# Altium PCB PCB1.PcbDoc (part 1 of 2)
Units mm, origin at the board's own origin, x right, y up, seen from the top; angles counter-clockwise.
Board outline 54.61 x 46.35 mm, 4 copper layers (Top Layer, Layer 1, Layer 2, Bottom Layer), stack 1.587 mm thick; 183 components, 132 nets, 434 pads, 125 vias.
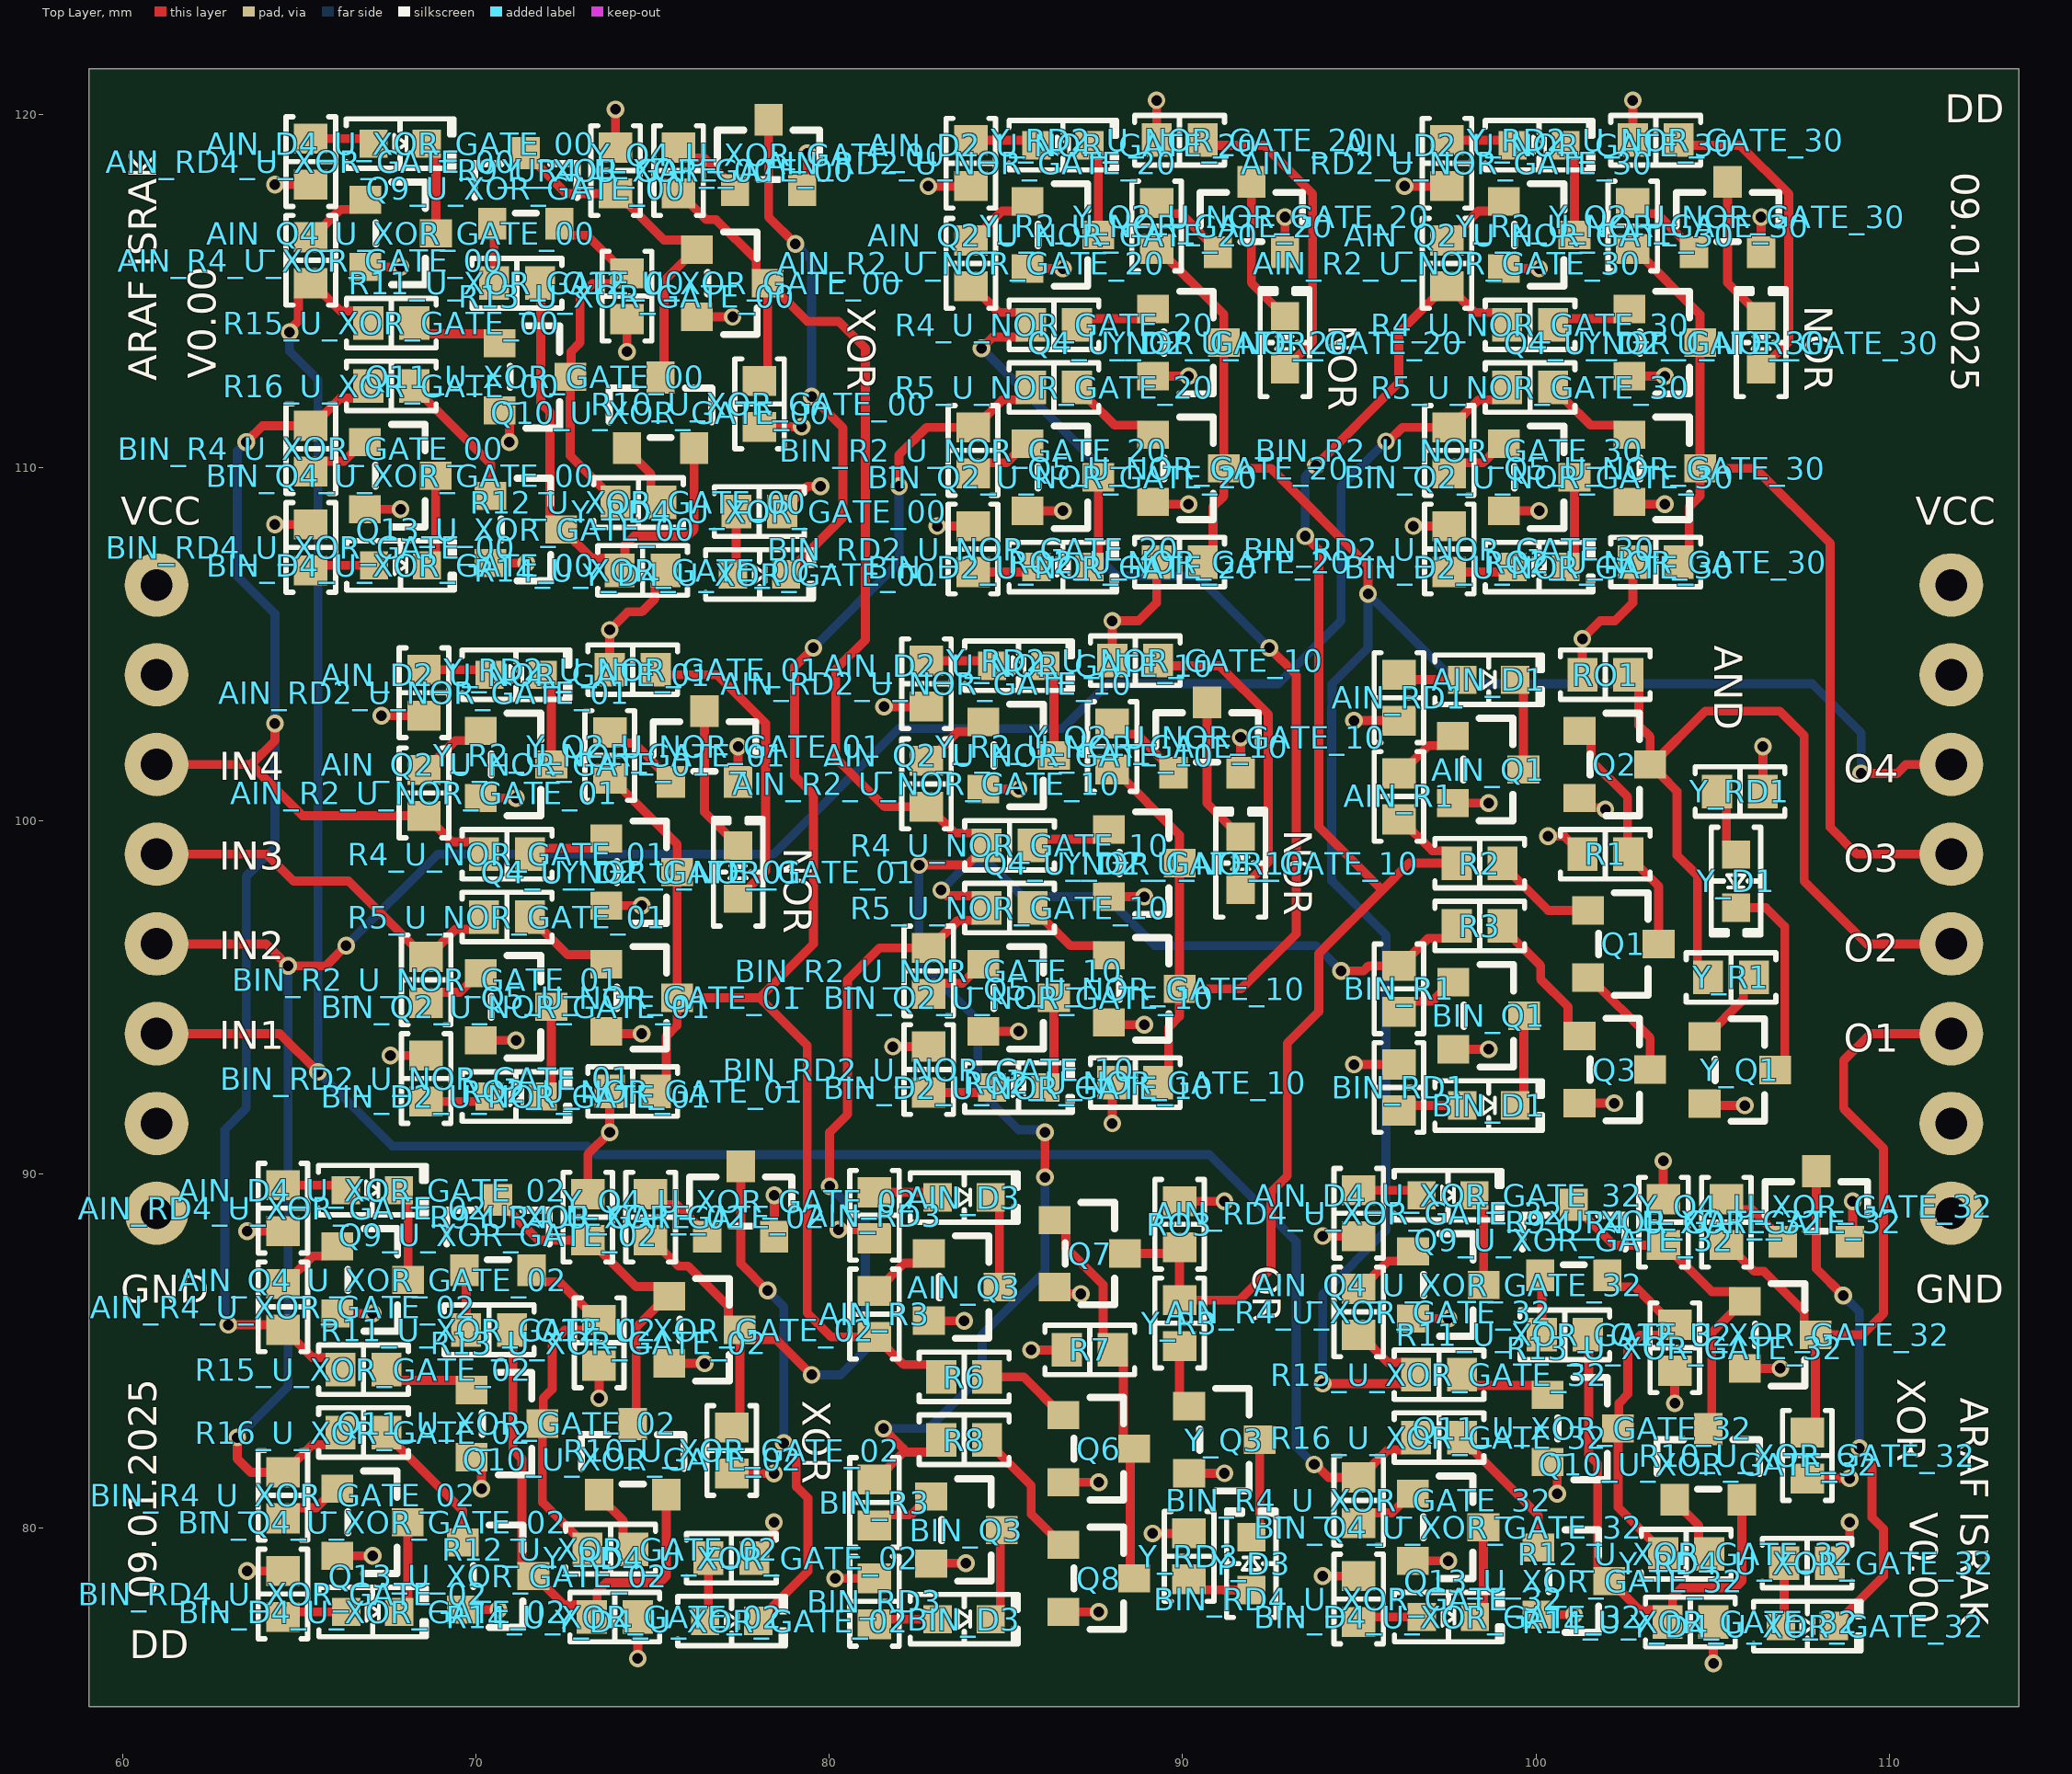
[diagram p0: Top Layer view]
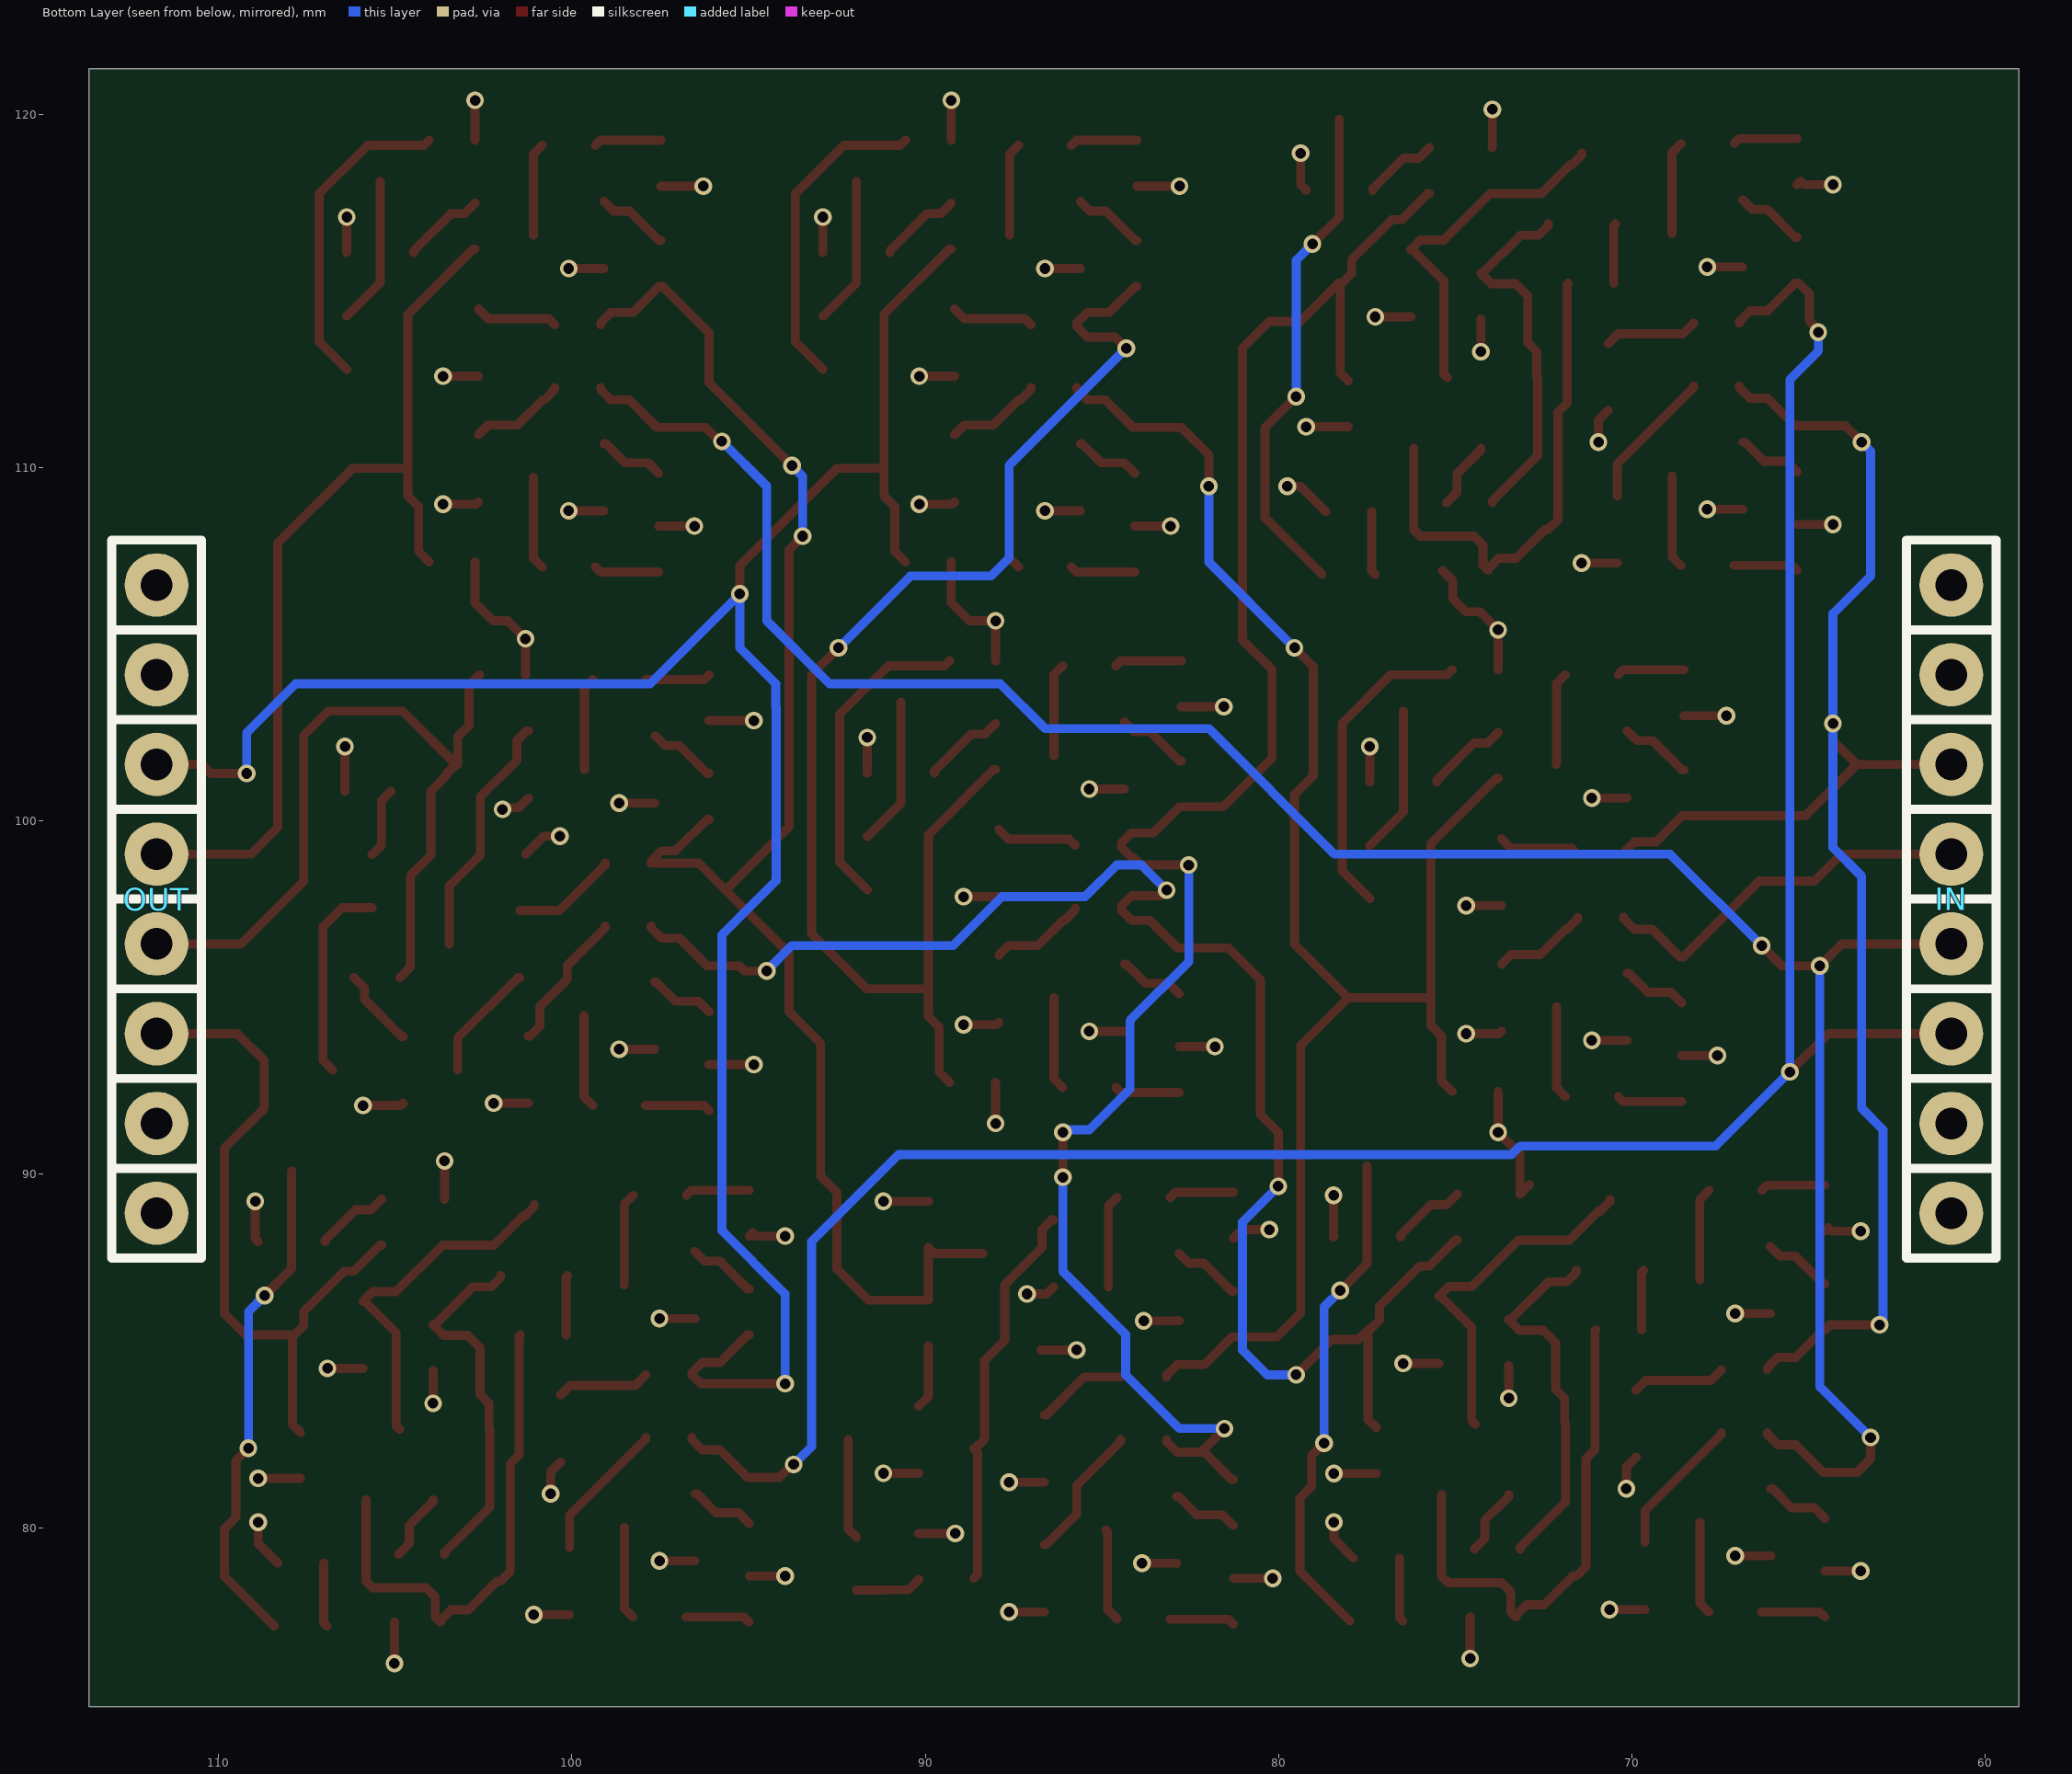
[diagram p1: Bottom Layer view, seen from below]
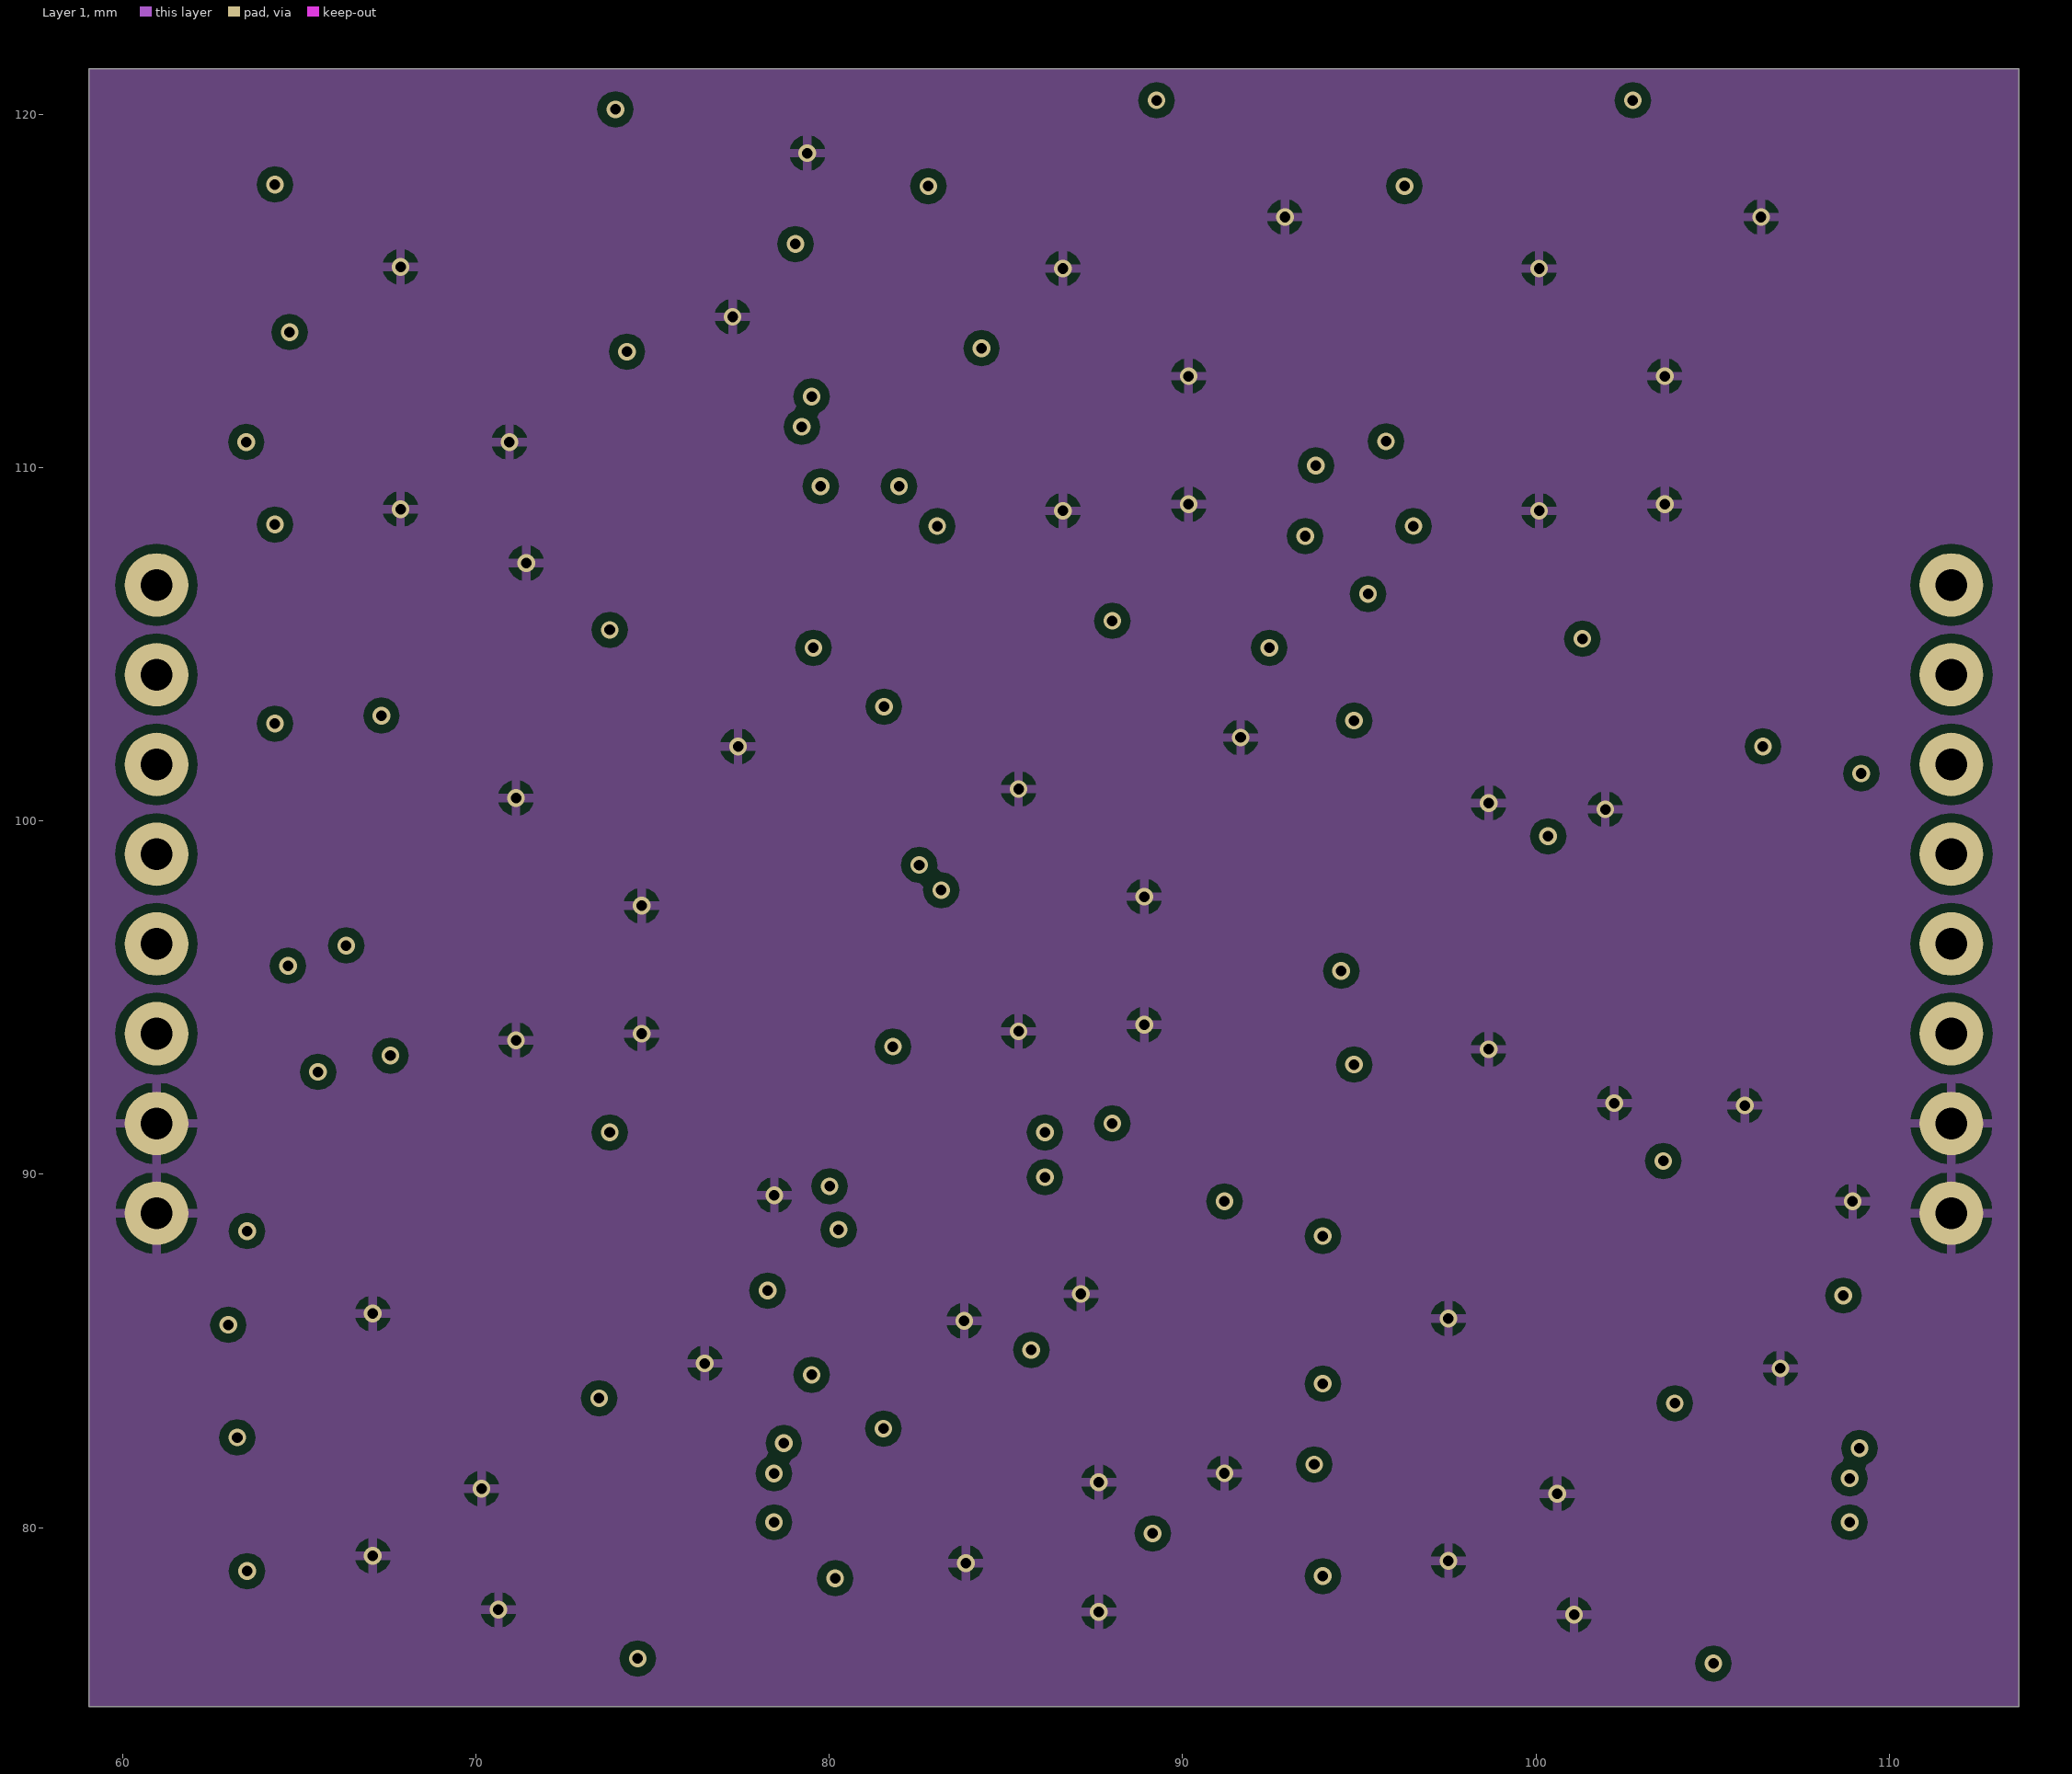
[diagram p2: Layer 1]
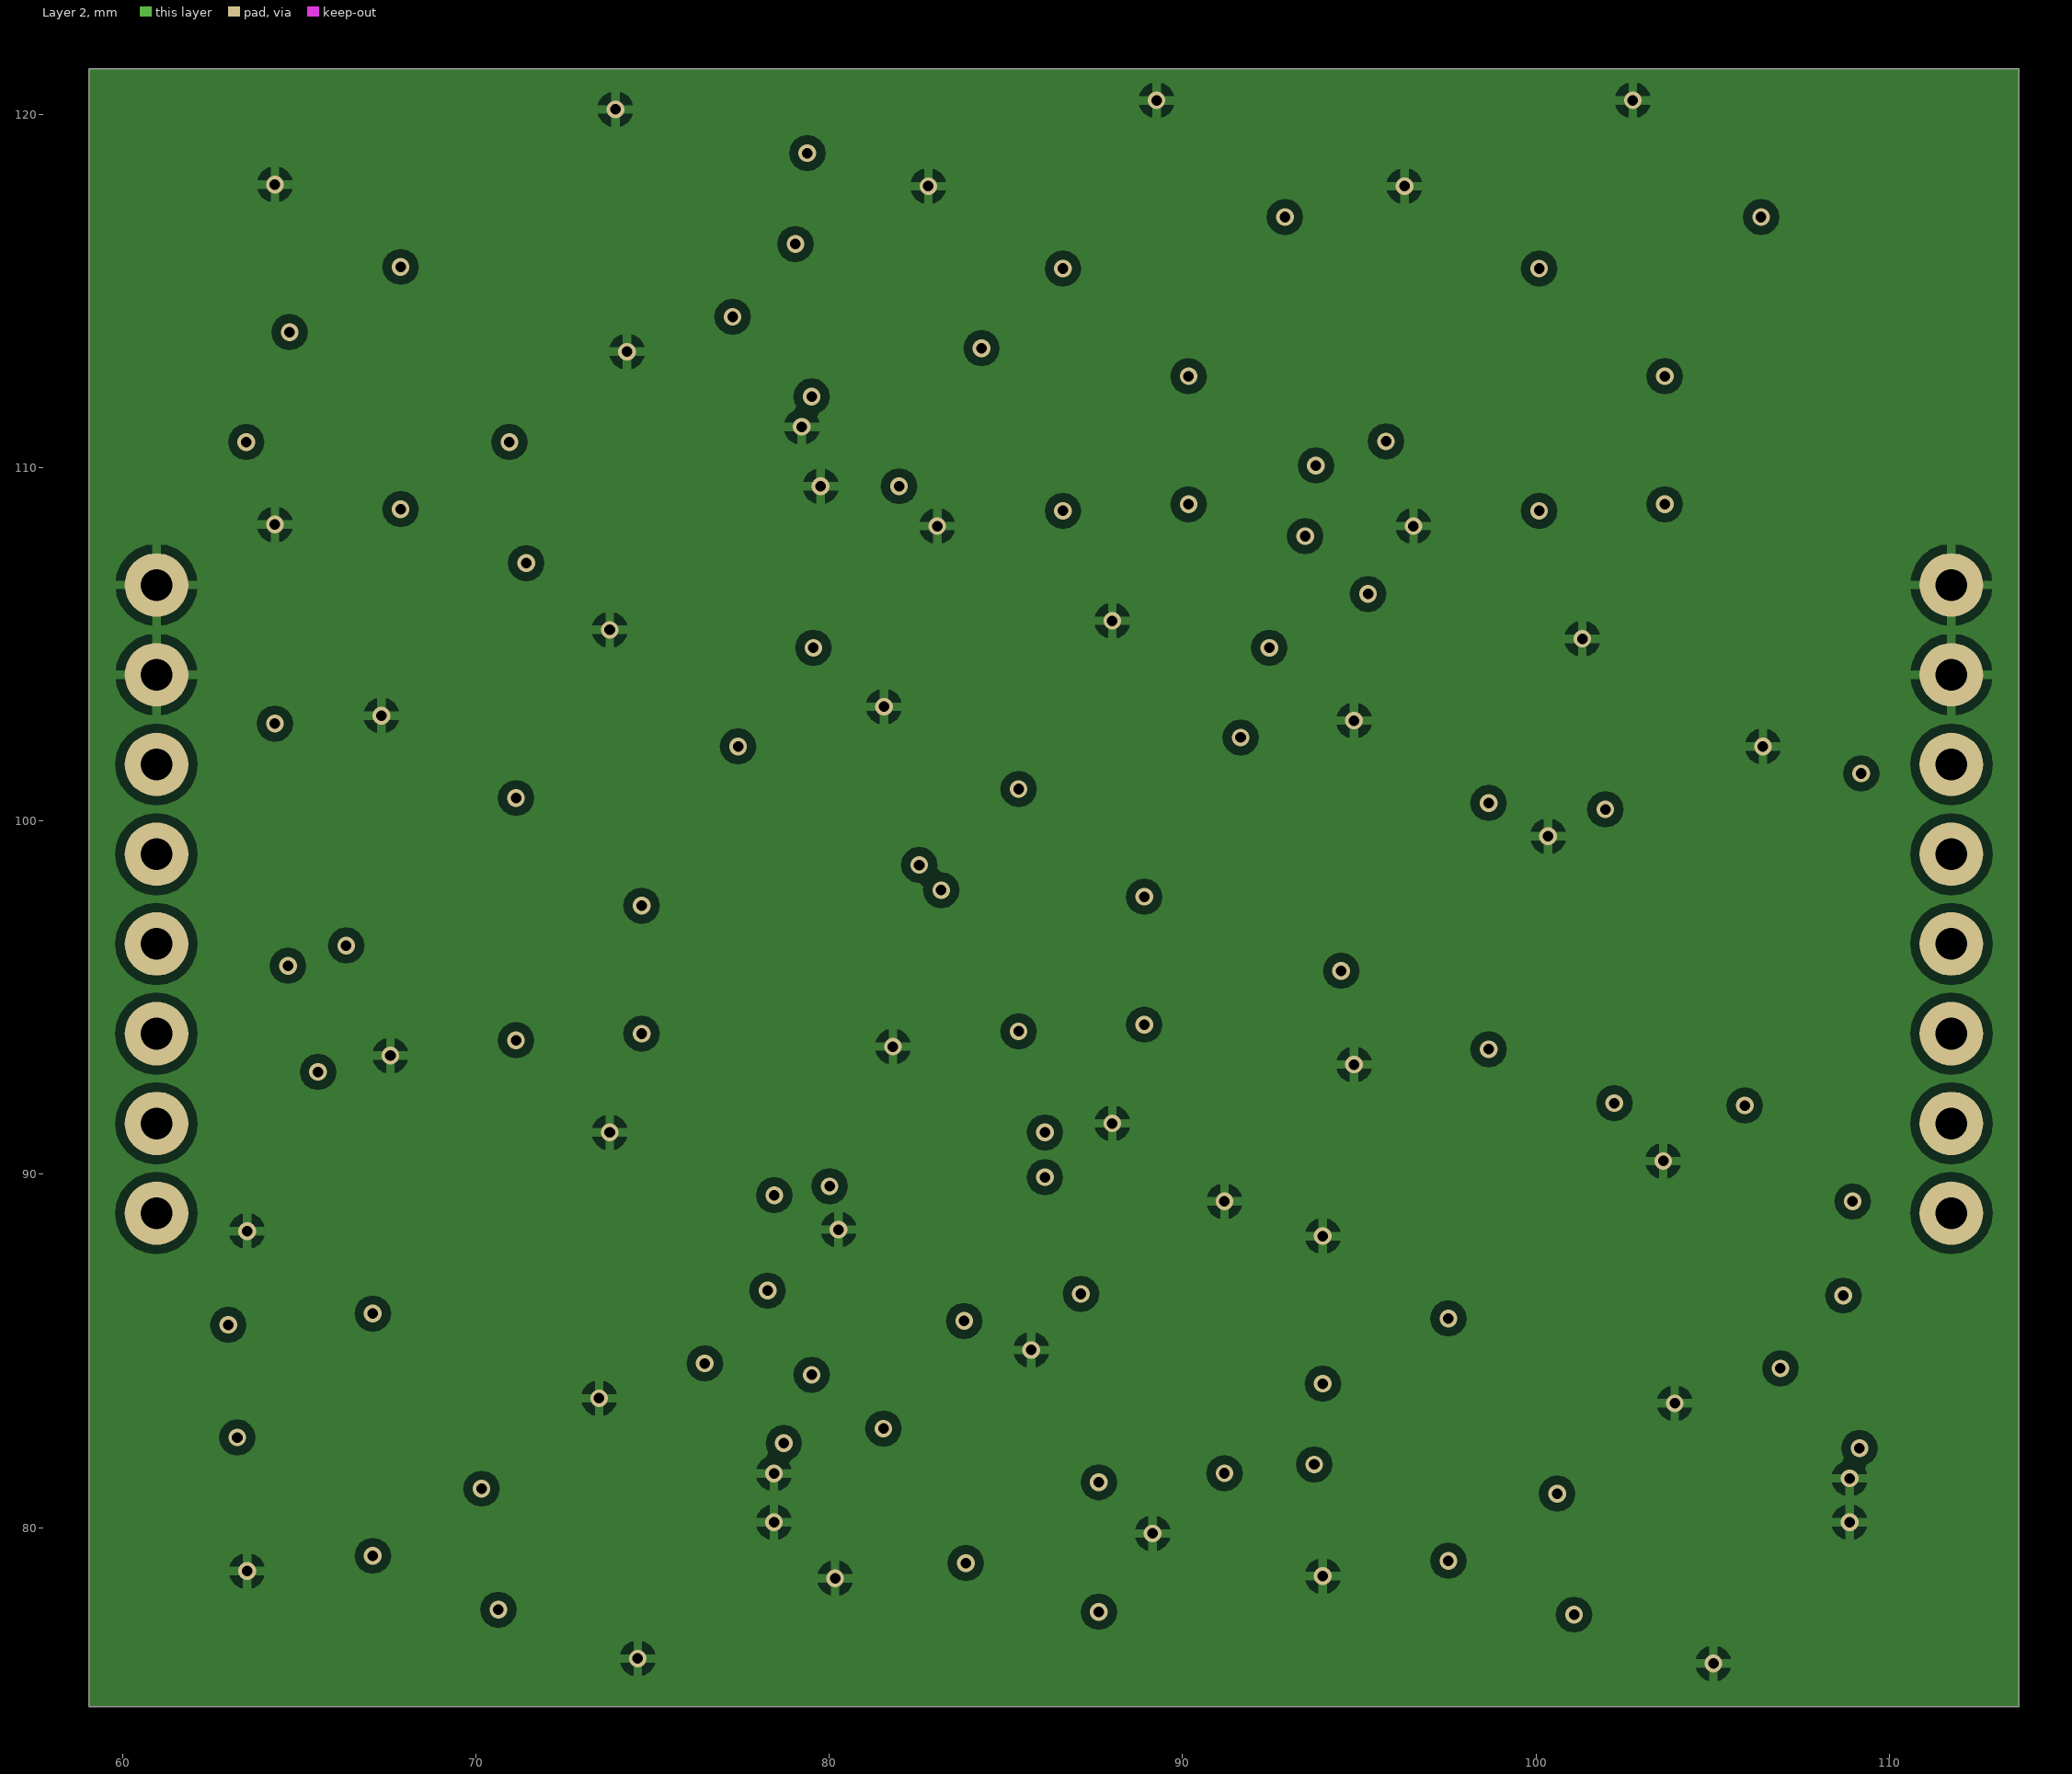
[diagram p3: Layer 2]
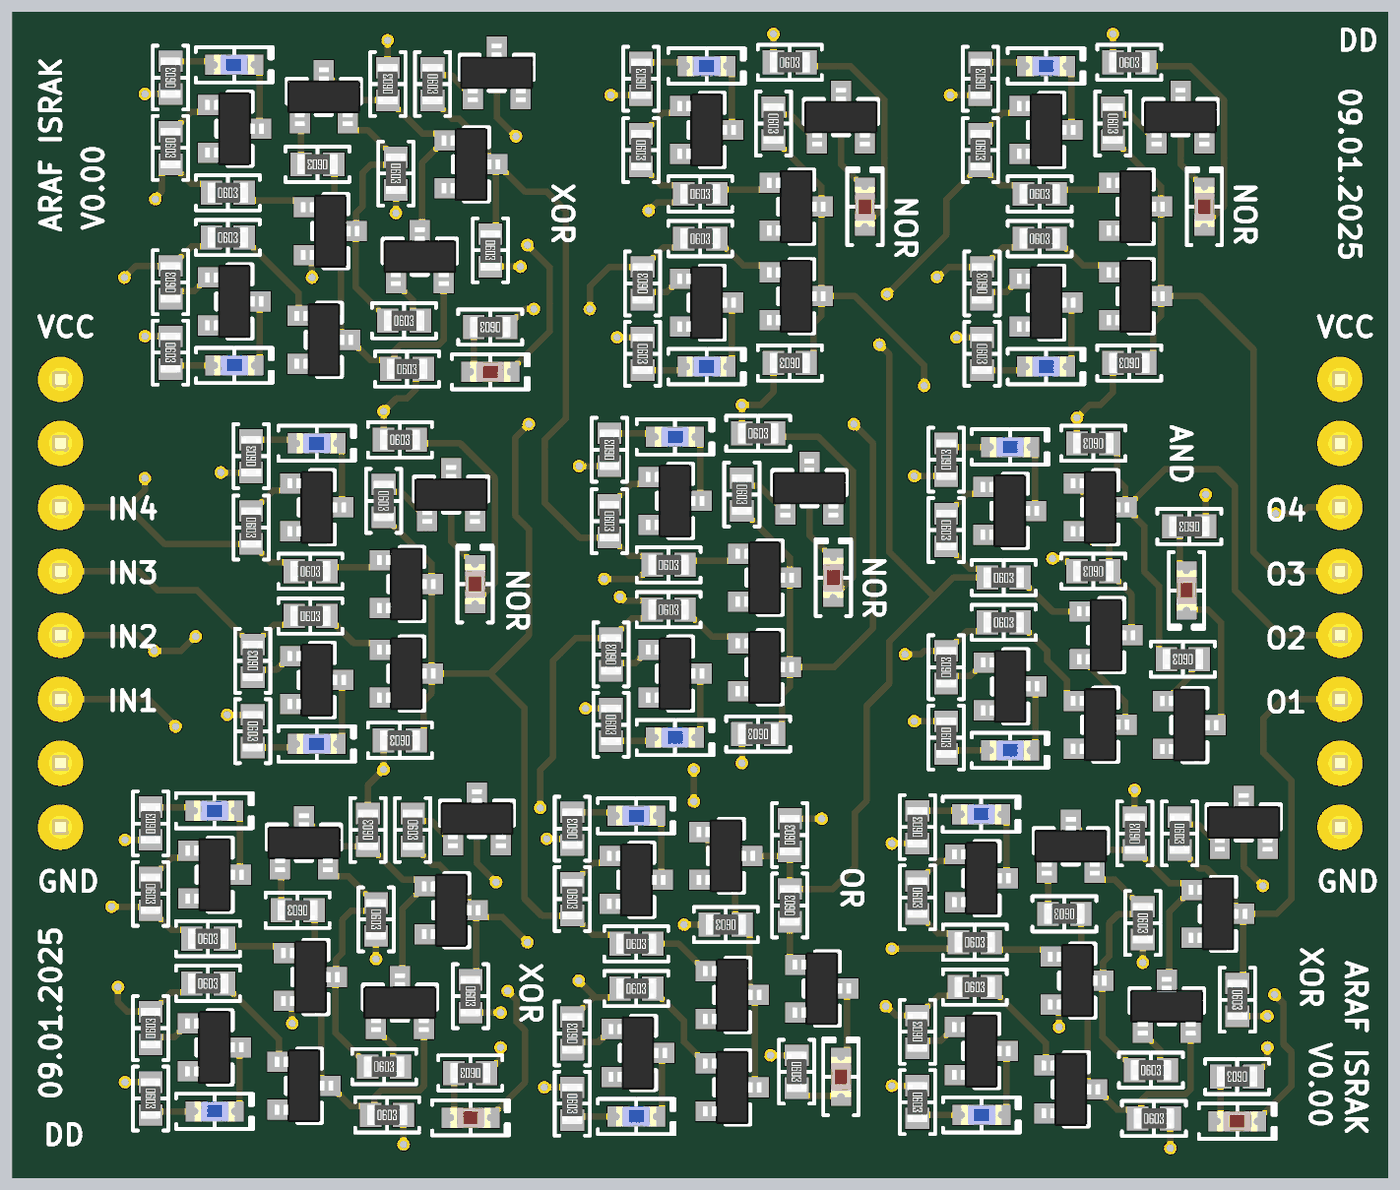
[diagram p5: 3D render of the assembled board from above, using the file's embedded part models]

## Layer stack, top to bottom
Top Solder: solder mask 0.0102, Solder Resist, Dk 3.5
Top Layer: signal copper 0.0356
Dielectric 2: prepreg 0.2104, PP-006, Dk 4.1
Layer 1: signal copper 0.0152
Dielectric 1: dielectric 1.065, FR-4, Dk 4.8
Layer 2: signal copper 0.0152
Dielectric 3: prepreg 0.2104, PP-006, Dk 4.1
Bottom Layer: signal copper 0.0356
Bottom Solder: solder mask 0.0102, Solder Resist, Dk 3.5

## Board outline
59.055,74.93 59.055,121.285 113.665,121.285 113.665,74.93

## Design rules (kind name [scope] priority, off if disabled: settings)
Clearance [All] p1: gap=0.254 ignorepadtopadclearanceinfootprint=FALSE except(0: Arc-Hole Track-Hole SMDPad-Hole THPad-Hole Via-Hole Fill-Hole Poly-Hole Region-Hole Text-Hole)
MinimumSolderMaskSliver [All] p1: minsoldermaskwidth=0.15
PolygonConnect [All] p1: connectstyle=Relief reliefconductorwidth=0.254 reliefentries=4 polygonreliefangle="90 Angle" airgapwidth=0.254
RoomDefinition U_XOR_GATE_32 [InComponentClass('U_XOR_GATE_32')] p1: confinementstyle=ConfineIn formatcopy=TRUE lockcomponents=FALSE outline 93.46,75.646 110.224,75.646 110.224,90.932 93.46,90.932
RoomDefinition U_XOR_GATE_02 [InComponentClass('U_XOR_GATE_02')] p2: confinementstyle=ConfineIn formatcopy=TRUE lockcomponents=FALSE outline 63.016,75.788 79.78,75.788 79.78,91.074 63.016,91.074
RoomDefinition U_XOR_GATE_00 [InComponentClass('U_XOR_GATE_00')] p3: confinementstyle=ConfineIn formatcopy=TRUE lockcomponents=FALSE outline 63.804,105.41 80.568,105.41 80.568,120.696 63.804,120.696
RoomDefinition U_OR_GATE_21 [InComponentClass('U_OR_GATE_21')] p4: confinementstyle=ConfineIn formatcopy=TRUE lockcomponents=FALSE outline 79.248,75.946 93.726,75.946 93.726,91.186 79.248,91.186
RoomDefinition U_NOR_GATE_30 [InComponentClass('U_NOR_GATE_30')] p5: confinementstyle=ConfineIn formatcopy=TRUE lockcomponents=FALSE outline 95.774,105.664 107.458,105.664 107.458,120.65 95.774,120.65
RoomDefinition U_NOR_GATE_20 [InComponentClass('U_NOR_GATE_20')] p6: confinementstyle=ConfineIn formatcopy=TRUE lockcomponents=FALSE outline 82.296,105.664 93.98,105.664 93.98,120.65 82.296,120.65
RoomDefinition U_NOR_GATE_10 [InComponentClass('U_NOR_GATE_10')] p7: confinementstyle=ConfineIn formatcopy=TRUE lockcomponents=FALSE outline 81.042,90.932 92.726,90.932 92.726,105.918 81.042,105.918
RoomDefinition U_NOR_GATE_01 [InComponentClass('U_NOR_GATE_01')] p8: confinementstyle=ConfineIn formatcopy=TRUE lockcomponents=FALSE outline 66.818,90.678 78.502,90.678 78.502,105.679 66.818,105.679
RoomDefinition U_AND_GATE_31 [InComponentClass('U_AND_GATE_31')] p9: confinementstyle=ConfineIn formatcopy=TRUE lockcomponents=FALSE outline 94.412,90.932 107.554,90.932 107.554,105.664 94.412,105.664
RoutingVias [All] p1: holewidth=0.3 width=0.5 viastyle="Through Hole" minholewidth=0.3 minwidth=0.5 maxholewidth=0.3 maxwidth=0.5
SilkToSolderMaskClearance [IsPad] p1: minsilkscreentomaskgap=0.1 clearancetoexposedcopper=TRUE
SolderMaskExpansion [All] p1: expansion=0.04
Width [All] p1: maxlimit=0.254 minlimit=0.254 preferedwidth=0.254
28 further rules are at their usual default settings.

## Classes and differential pairs
channel class XOR_GATE: U_XOR_GATE_00 U_XOR_GATE_02 U_XOR_GATE_32
channel class NOR_GATE: U_NOR_GATE_01 U_NOR_GATE_10 U_NOR_GATE_20 U_NOR_GATE_30
component class U_XOR_GATE_32: AIN_D4_U_XOR_GATE_32 AIN_Q4_U_XOR_GATE_32 AIN_R4_U_XOR_GATE_32 AIN_RD4_U_XOR_GATE_32 BIN_D4_U_XOR_GATE_32 BIN_Q4_U_XOR_GATE_32 BIN_R4_U_XOR_GATE_32 BIN_RD4_U_XOR_GATE_32 Q9_U_XOR_GATE_32 Q10_U_XOR_GATE_32 Q11_U_XOR_GATE_32 Q12_U_XOR_GATE_32 Q13_U_XOR_GATE_32 R9_U_XOR_GATE_32 R10_U_XOR_GATE_32 R11_U_XOR_GATE_32 R12_U_XOR_GATE_32 R13_U_XOR_GATE_32 R14_U_XOR_GATE_32 R15_U_XOR_GATE_32 R16_U_XOR_GATE_32 Y_D4_U_XOR_GATE_32 Y_Q4_U_XOR_GATE_32 Y_R4_U_XOR_GATE_32 Y_RD4_U_XOR_GATE_32
component class U_XOR_GATE_02: AIN_D4_U_XOR_GATE_02 AIN_Q4_U_XOR_GATE_02 AIN_R4_U_XOR_GATE_02 AIN_RD4_U_XOR_GATE_02 BIN_D4_U_XOR_GATE_02 BIN_Q4_U_XOR_GATE_02 BIN_R4_U_XOR_GATE_02 BIN_RD4_U_XOR_GATE_02 Q9_U_XOR_GATE_02 Q10_U_XOR_GATE_02 Q11_U_XOR_GATE_02 Q12_U_XOR_GATE_02 Q13_U_XOR_GATE_02 R9_U_XOR_GATE_02 R10_U_XOR_GATE_02 R11_U_XOR_GATE_02 R12_U_XOR_GATE_02 R13_U_XOR_GATE_02 R14_U_XOR_GATE_02 R15_U_XOR_GATE_02 R16_U_XOR_GATE_02 Y_D4_U_XOR_GATE_02 Y_Q4_U_XOR_GATE_02 Y_R4_U_XOR_GATE_02 Y_RD4_U_XOR_GATE_02
component class U_XOR_GATE_00: AIN_D4_U_XOR_GATE_00 AIN_Q4_U_XOR_GATE_00 AIN_R4_U_XOR_GATE_00 AIN_RD4_U_XOR_GATE_00 BIN_D4_U_XOR_GATE_00 BIN_Q4_U_XOR_GATE_00 BIN_R4_U_XOR_GATE_00 BIN_RD4_U_XOR_GATE_00 Q9_U_XOR_GATE_00 Q10_U_XOR_GATE_00 Q11_U_XOR_GATE_00 Q12_U_XOR_GATE_00 Q13_U_XOR_GATE_00 R9_U_XOR_GATE_00 R10_U_XOR_GATE_00 R11_U_XOR_GATE_00 R12_U_XOR_GATE_00 R13_U_XOR_GATE_00 R14_U_XOR_GATE_00 R15_U_XOR_GATE_00 R16_U_XOR_GATE_00 Y_D4_U_XOR_GATE_00 Y_Q4_U_XOR_GATE_00 Y_R4_U_XOR_GATE_00 Y_RD4_U_XOR_GATE_00
component class U_OR_GATE_21: AIN_D3 AIN_Q3 AIN_R3 AIN_RD3 BIN_D3 BIN_Q3 BIN_R3 BIN_RD3 Q6 Q7 Q8 R6 R7 R8 RO3 Y_D3 Y_Q3 Y_R3 Y_RD3
component class U_NOR_GATE_30: AIN_D2_U_NOR_GATE_30 AIN_Q2_U_NOR_GATE_30 AIN_R2_U_NOR_GATE_30 AIN_RD2_U_NOR_GATE_30 BIN_D2_U_NOR_GATE_30 BIN_Q2_U_NOR_GATE_30 BIN_R2_U_NOR_GATE_30 BIN_RD2_U_NOR_GATE_30 Q4_U_NOR_GATE_30 Q5_U_NOR_GATE_30 R4_U_NOR_GATE_30 R5_U_NOR_GATE_30 RO2_U_NOR_GATE_30 Y_D2_U_NOR_GATE_30 Y_Q2_U_NOR_GATE_30 Y_R2_U_NOR_GATE_30 Y_RD2_U_NOR_GATE_30
component class U_NOR_GATE_20: AIN_D2_U_NOR_GATE_20 AIN_Q2_U_NOR_GATE_20 AIN_R2_U_NOR_GATE_20 AIN_RD2_U_NOR_GATE_20 BIN_D2_U_NOR_GATE_20 BIN_Q2_U_NOR_GATE_20 BIN_R2_U_NOR_GATE_20 BIN_RD2_U_NOR_GATE_20 Q4_U_NOR_GATE_20 Q5_U_NOR_GATE_20 R4_U_NOR_GATE_20 R5_U_NOR_GATE_20 RO2_U_NOR_GATE_20 Y_D2_U_NOR_GATE_20 Y_Q2_U_NOR_GATE_20 Y_R2_U_NOR_GATE_20 Y_RD2_U_NOR_GATE_20
component class U_NOR_GATE_10: AIN_D2_U_NOR_GATE_10 AIN_Q2_U_NOR_GATE_10 AIN_R2_U_NOR_GATE_10 AIN_RD2_U_NOR_GATE_10 BIN_D2_U_NOR_GATE_10 BIN_Q2_U_NOR_GATE_10 BIN_R2_U_NOR_GATE_10 BIN_RD2_U_NOR_GATE_10 Q4_U_NOR_GATE_10 Q5_U_NOR_GATE_10 R4_U_NOR_GATE_10 R5_U_NOR_GATE_10 RO2_U_NOR_GATE_10 Y_D2_U_NOR_GATE_10 Y_Q2_U_NOR_GATE_10 Y_R2_U_NOR_GATE_10 Y_RD2_U_NOR_GATE_10
component class U_NOR_GATE_01: AIN_D2_U_NOR_GATE_01 AIN_Q2_U_NOR_GATE_01 AIN_R2_U_NOR_GATE_01 AIN_RD2_U_NOR_GATE_01 BIN_D2_U_NOR_GATE_01 BIN_Q2_U_NOR_GATE_01 BIN_R2_U_NOR_GATE_01 BIN_RD2_U_NOR_GATE_01 Q4_U_NOR_GATE_01 Q5_U_NOR_GATE_01 R4_U_NOR_GATE_01 R5_U_NOR_GATE_01 RO2_U_NOR_GATE_01 Y_D2_U_NOR_GATE_01 Y_Q2_U_NOR_GATE_01 Y_R2_U_NOR_GATE_01 Y_RD2_U_NOR_GATE_01
component class U_AND_GATE_31: AIN_D1 AIN_Q1 AIN_R1 AIN_RD1 BIN_D1 BIN_Q1 BIN_R1 BIN_RD1 Q1 Q2 Q3 R1 R2 R3 RO1 Y_D1 Y_Q1 Y_R1 Y_RD1
component class MODULE_1: IN OUT

## Components (designator, comment, footprint, x,y, rotation, side; value= is the part's Value field where it differs from the comment)
AIN_D1 "Blue" "LED 0603_1608 BLUE" 98.664,103.998 r0 top
AIN_D2_U_NOR_GATE_01 "Blue" "LED 0603_1608 BLUE" 71.136,104.14 r0 top (schematic designator AIN_D2)
AIN_D2_U_NOR_GATE_10 "Blue" "LED 0603_1608 BLUE" 85.36,104.394 r0 top (schematic designator AIN_D2)
AIN_D2_U_NOR_GATE_20 "Blue" "LED 0603_1608 BLUE" 86.614,119.126 r0 top (schematic designator AIN_D2)
AIN_D2_U_NOR_GATE_30 "Blue" "LED 0603_1608 BLUE" 100.092,119.126 r0 top (schematic designator AIN_D2)
AIN_D3 "Blue" "LED 0603_1608 BLUE" 83.82,89.346 r0 top
AIN_D4_U_XOR_GATE_00 "Blue" "LED 0603_1608 BLUE" 67.856,119.172 r0 top (schematic designator AIN_D4)
AIN_D4_U_XOR_GATE_02 "Blue" "LED 0603_1608 BLUE" 67.068,89.55 r0 top (schematic designator AIN_D4)
AIN_D4_U_XOR_GATE_32 "Blue" "LED 0603_1608 BLUE" 97.512,89.408 r0 top (schematic designator AIN_D4)
AIN_Q1 "#NAME?" "MCCSEMI SOT-23-3" 98.648,101.458 r0 top
AIN_Q2_U_NOR_GATE_01 "#NAME?" "MCCSEMI SOT-23-3" 71.136,101.6 r0 top (schematic designator AIN_Q2)
AIN_Q2_U_NOR_GATE_10 "#NAME?" "MCCSEMI SOT-23-3" 85.36,101.854 r0 top (schematic designator AIN_Q2)
AIN_Q2_U_NOR_GATE_20 "#NAME?" "MCCSEMI SOT-23-3" 86.614,116.586 r0 top (schematic designator AIN_Q2)
AIN_Q2_U_NOR_GATE_30 "#NAME?" "MCCSEMI SOT-23-3" 100.092,116.586 r0 top (schematic designator AIN_Q2)
AIN_Q3 "#NAME?" "MCCSEMI SOT-23-3" 83.82,86.806 r0 top
AIN_Q4_U_XOR_GATE_00 "#NAME?" "MCCSEMI SOT-23-3" 67.868,116.632 r0 top (schematic designator AIN_Q4)
AIN_Q4_U_XOR_GATE_02 "#NAME?" "MCCSEMI SOT-23-3" 67.08,87.01 r0 top (schematic designator AIN_Q4)
AIN_Q4_U_XOR_GATE_32 "#NAME?" "MCCSEMI SOT-23-3" 97.524,86.868 r0 top (schematic designator AIN_Q4)
AIN_R1 "1 kOhms" "RES 0603_1608" 96.124,100.696 r270 top
AIN_R2_U_NOR_GATE_01 "1 kOhms" "RES 0603_1608" 68.53,100.796 r270 top (schematic designator AIN_R2)
AIN_R2_U_NOR_GATE_10 "1 kOhms" "RES 0603_1608" 82.754,101.05 r270 top (schematic designator AIN_R2)
AIN_R2_U_NOR_GATE_20 "1 kOhms" "RES 0603_1608" 84.008,115.782 r270 top (schematic designator AIN_R2)
AIN_R2_U_NOR_GATE_30 "1 kOhms" "RES 0603_1608" 97.486,115.782 r270 top (schematic designator AIN_R2)
AIN_R3 "1 kOhms" "RES 0603_1608" 81.28,86.044 r270 top
AIN_R4_U_XOR_GATE_00 "1 kOhms" "RES 0603_1608" 65.328,115.87 r270 top (schematic designator AIN_R4)
AIN_R4_U_XOR_GATE_02 "1 kOhms" "RES 0603_1608" 64.54,86.248 r270 top (schematic designator AIN_R4)
AIN_R4_U_XOR_GATE_32 "1 kOhms" "RES 0603_1608" 94.984,86.106 r270 top (schematic designator AIN_R4)
AIN_RD1 "330 Ohms" "RES 0603_1608" 96.124,103.49 r90 top
AIN_RD2_U_NOR_GATE_01 "330 Ohms" "RES 0603_1608" 68.53,103.632 r90 top (schematic designator AIN_RD2)
AIN_RD2_U_NOR_GATE_10 "330 Ohms" "RES 0603_1608" 82.754,103.886 r90 top (schematic designator AIN_RD2)
AIN_RD2_U_NOR_GATE_20 "330 Ohms" "RES 0603_1608" 84.008,118.618 r90 top (schematic designator AIN_RD2)
AIN_RD2_U_NOR_GATE_30 "330 Ohms" "RES 0603_1608" 97.486,118.618 r90 top (schematic designator AIN_RD2)
AIN_RD3 "330 Ohms" "RES 0603_1608" 81.28,88.838 r90 top
AIN_RD4_U_XOR_GATE_00 "330 Ohms" "RES 0603_1608" 65.328,118.664 r90 top (schematic designator AIN_RD4)
AIN_RD4_U_XOR_GATE_02 "330 Ohms" "RES 0603_1608" 64.54,89.042 r90 top (schematic designator AIN_RD4)
AIN_RD4_U_XOR_GATE_32 "330 Ohms" "RES 0603_1608" 94.984,88.9 r90 top (schematic designator AIN_RD4)
BIN_D1 "Blue" "LED 0603_1608 BLUE" 98.664,91.948 r0 top
BIN_D2_U_NOR_GATE_01 "Blue" "LED 0603_1608 BLUE" 71.136,92.202 r0 top (schematic designator BIN_D2)
BIN_D2_U_NOR_GATE_10 "Blue" "LED 0603_1608 BLUE" 85.36,92.456 r0 top (schematic designator BIN_D2)
BIN_D2_U_NOR_GATE_20 "Blue" "LED 0603_1608 BLUE" 86.614,107.188 r0 top (schematic designator BIN_D2)
BIN_D2_U_NOR_GATE_30 "Blue" "LED 0603_1608 BLUE" 100.092,107.188 r0 top (schematic designator BIN_D2)
BIN_D3 "Blue" "LED 0603_1608 BLUE" 83.82,77.408 r0 top
BIN_D4_U_XOR_GATE_00 "Blue" "LED 0603_1608 BLUE" 67.868,107.234 r0 top (schematic designator BIN_D4)
BIN_D4_U_XOR_GATE_02 "Blue" "LED 0603_1608 BLUE" 67.08,77.612 r0 top (schematic designator BIN_D4)
BIN_D4_U_XOR_GATE_32 "Blue" "LED 0603_1608 BLUE" 97.524,77.47 r0 top (schematic designator BIN_D4)
BIN_Q1 "#NAME?" "MCCSEMI SOT-23-3" 98.664,94.488 r0 top
BIN_Q2_U_NOR_GATE_01 "#NAME?" "MCCSEMI SOT-23-3" 71.136,94.742 r0 top (schematic designator BIN_Q2)
BIN_Q2_U_NOR_GATE_10 "#NAME?" "MCCSEMI SOT-23-3" 85.36,94.996 r0 top (schematic designator BIN_Q2)
BIN_Q2_U_NOR_GATE_20 "#NAME?" "MCCSEMI SOT-23-3" 86.614,109.728 r0 top (schematic designator BIN_Q2)
BIN_Q2_U_NOR_GATE_30 "#NAME?" "MCCSEMI SOT-23-3" 100.092,109.728 r0 top (schematic designator BIN_Q2)
BIN_Q3 "#NAME?" "MCCSEMI SOT-23-3" 83.886,79.932 r0 top
BIN_Q4_U_XOR_GATE_00 "#NAME?" "MCCSEMI SOT-23-3" 67.86,109.774 r0 top (schematic designator BIN_Q4)
BIN_Q4_U_XOR_GATE_02 "#NAME?" "MCCSEMI SOT-23-3" 67.072,80.152 r0 top (schematic designator BIN_Q4)
BIN_Q4_U_XOR_GATE_32 "#NAME?" "MCCSEMI SOT-23-3" 97.516,80.01 r0 top (schematic designator BIN_Q4)
BIN_R1 "1 kOhms" "RES 0603_1608" 96.124,95.25 r90 top
BIN_R2_U_NOR_GATE_01 "1 kOhms" "RES 0603_1608" 68.592,95.504 r90 top (schematic designator BIN_R2)
BIN_R2_U_NOR_GATE_10 "1 kOhms" "RES 0603_1608" 82.816,95.758 r90 top (schematic designator BIN_R2)
BIN_R2_U_NOR_GATE_20 "1 kOhms" "RES 0603_1608" 84.07,110.49 r90 top (schematic designator BIN_R2)
BIN_R2_U_NOR_GATE_30 "1 kOhms" "RES 0603_1608" 97.548,110.49 r90 top (schematic designator BIN_R2)
BIN_R3 "1 kOhms" "RES 0603_1608" 81.28,80.71 r90 top
BIN_R4_U_XOR_GATE_00 "1 kOhms" "RES 0603_1608" 65.328,110.536 r90 top (schematic designator BIN_R4)
BIN_R4_U_XOR_GATE_02 "1 kOhms" "RES 0603_1608" 64.54,80.914 r90 top (schematic designator BIN_R4)
BIN_R4_U_XOR_GATE_32 "1 kOhms" "RES 0603_1608" 94.984,80.772 r90 top (schematic designator BIN_R4)
BIN_RD1 "330 Ohms" "RES 0603_1608" 96.124,92.456 r270 top
BIN_RD2_U_NOR_GATE_01 "330 Ohms" "RES 0603_1608" 68.592,92.71 r270 top (schematic designator BIN_RD2)
BIN_RD2_U_NOR_GATE_10 "330 Ohms" "RES 0603_1608" 82.816,92.964 r270 top (schematic designator BIN_RD2)
BIN_RD2_U_NOR_GATE_20 "330 Ohms" "RES 0603_1608" 84.07,107.696 r270 top (schematic designator BIN_RD2)
BIN_RD2_U_NOR_GATE_30 "330 Ohms" "RES 0603_1608" 97.548,107.696 r270 top (schematic designator BIN_RD2)
BIN_RD3 "330 Ohms" "RES 0603_1608" 81.28,77.916 r270 top
BIN_RD4_U_XOR_GATE_00 "330 Ohms" "RES 0603_1608" 65.328,107.742 r270 top (schematic designator BIN_RD4)
BIN_RD4_U_XOR_GATE_02 "330 Ohms" "RES 0603_1608" 64.54,78.12 r270 top (schematic designator BIN_RD4)
BIN_RD4_U_XOR_GATE_32 "330 Ohms" "RES 0603_1608" 94.984,77.978 r270 top (schematic designator BIN_RD4)
IN "2.54mm_TH_1x8_pin_header" 2.54mm_TH_1x8_pin_header 60.96,99.06 r270 bottom
OUT "2.54mm_TH_1x8_pin_header" 2.54mm_TH_1x8_pin_header 111.76,99.06 r270 bottom
Q1 "#NAME?" "MCCSEMI SOT-23-3" 102.474,96.52 r0 top
Q2 "#NAME?" "MCCSEMI SOT-23-3" 102.236,101.6 r0 top
Q3 "#NAME?" "MCCSEMI SOT-23-3" 102.236,92.964 r0 top
Q4_U_NOR_GATE_01 "#NAME?" "MCCSEMI SOT-23-3" 74.692,98.552 r0 top (schematic designator Q4)
Q4_U_NOR_GATE_10 "#NAME?" "MCCSEMI SOT-23-3" 88.916,98.806 r0 top (schematic designator Q4)
Q4_U_NOR_GATE_20 "#NAME?" "MCCSEMI SOT-23-3" 90.17,113.538 r0 top (schematic designator Q4)
Q4_U_NOR_GATE_30 "#NAME?" "MCCSEMI SOT-23-3" 103.648,113.538 r0 top (schematic designator Q4)
Q5_U_NOR_GATE_01 "#NAME?" "MCCSEMI SOT-23-3" 74.692,94.996 r0 top (schematic designator Q5)
Q5_U_NOR_GATE_10 "#NAME?" "MCCSEMI SOT-23-3" 88.916,95.25 r0 top (schematic designator Q5)
Q5_U_NOR_GATE_20 "#NAME?" "MCCSEMI SOT-23-3" 90.17,109.982 r0 top (schematic designator Q5)
Q5_U_NOR_GATE_30 "#NAME?" "MCCSEMI SOT-23-3" 103.648,109.982 r0 top (schematic designator Q5)
Q6 "#NAME?" "MCCSEMI SOT-23-3" 87.63,82.234 r0 top
Q7 "#NAME?" "MCCSEMI SOT-23-3" 87.376,87.756 r0 top
Q8 "#NAME?" "MCCSEMI SOT-23-3" 87.63,78.566 r0 top
Q9_U_XOR_GATE_00 "#NAME?" "MCCSEMI SOT-23-3" 71.416,117.902 r90 top (schematic designator Q9)
Q9_U_XOR_GATE_02 "#NAME?" "MCCSEMI SOT-23-3" 70.628,88.28 r90 top (schematic designator Q9)
Q9_U_XOR_GATE_32 "#NAME?" "MCCSEMI SOT-23-3" 101.072,88.138 r90 top (schematic designator Q9)
Q10_U_XOR_GATE_00 "#NAME?" "MCCSEMI SOT-23-3" 75.226,111.552 r90 top (schematic designator Q10)
Q10_U_XOR_GATE_02 "#NAME?" "MCCSEMI SOT-23-3" 74.438,81.93 r90 top (schematic designator Q10)
Q10_U_XOR_GATE_32 "#NAME?" "MCCSEMI SOT-23-3" 104.882,81.788 r90 top (schematic designator Q10)
Q11_U_XOR_GATE_00 "#NAME?" "MCCSEMI SOT-23-3" 71.67,112.568 r0 top (schematic designator Q11)
Q11_U_XOR_GATE_02 "#NAME?" "MCCSEMI SOT-23-3" 70.882,82.946 r0 top (schematic designator Q11)
Q11_U_XOR_GATE_32 "#NAME?" "MCCSEMI SOT-23-3" 101.326,82.804 r0 top (schematic designator Q11)
Q12_U_XOR_GATE_00 "#NAME?" "MCCSEMI SOT-23-3" 77.258,115.22 r0 top (schematic designator Q12)
Q12_U_XOR_GATE_02 "#NAME?" "MCCSEMI SOT-23-3" 76.47,85.598 r0 top (schematic designator Q12)
Q12_U_XOR_GATE_32 "#NAME?" "MCCSEMI SOT-23-3" 106.914,85.456 r0 top (schematic designator Q12)
Q13_U_XOR_GATE_00 "#NAME?" "MCCSEMI SOT-23-3" 71.416,108.25 r0 top (schematic designator Q13)
Q13_U_XOR_GATE_02 "#NAME?" "MCCSEMI SOT-23-3" 70.628,78.628 r0 top (schematic designator Q13)
Q13_U_XOR_GATE_32 "#NAME?" "MCCSEMI SOT-23-3" 101.072,78.486 r0 top (schematic designator Q13)
R1 "1 kOhms" "RES 0603_1608" 101.966,99.06 r180 top
R2 "1 kOhms" "RES 0603_1608" 98.41,98.806 r0 top
R3 "1 kOhms" "RES 0603_1608" 98.41,97.028 r0 top
R4_U_NOR_GATE_01 "1 kOhms" "RES 0603_1608" 70.882,99.06 r0 top (schematic designator R4)
R4_U_NOR_GATE_10 "1 kOhms" "RES 0603_1608" 85.106,99.314 r0 top (schematic designator R4)
R4_U_NOR_GATE_20 "1 kOhms" "RES 0603_1608" 86.36,114.046 r0 top (schematic designator R4)
R4_U_NOR_GATE_30 "1 kOhms" "RES 0603_1608" 99.838,114.046 r0 top (schematic designator R4)
R5_U_NOR_GATE_01 "1 kOhms" "RES 0603_1608" 70.882,97.282 r0 top (schematic designator R5)
R5_U_NOR_GATE_10 "1 kOhms" "RES 0603_1608" 85.106,97.536 r0 top (schematic designator R5)
R5_U_NOR_GATE_20 "1 kOhms" "RES 0603_1608" 86.36,112.268 r0 top (schematic designator R5)
R5_U_NOR_GATE_30 "1 kOhms" "RES 0603_1608" 99.838,112.268 r0 top (schematic designator R5)
R6 "1 kOhms" "RES 0603_1608" 83.82,84.266 r0 top
R7 "1 kOhms" "RES 0603_1608" 87.376,85.028 r180 top
R8 "1 kOhms" "RES 0603_1608" 83.82,82.488 r0 top
R9_U_XOR_GATE_00 "1 kOhms" "RES 0603_1608" 73.956,118.41 r90 top (schematic designator R9)
R9_U_XOR_GATE_02 "1 kOhms" "RES 0603_1608" 73.168,88.788 r90 top (schematic designator R9)
R9_U_XOR_GATE_32 "1 kOhms" "RES 0603_1608" 103.612,88.646 r90 top (schematic designator R9)
R10_U_XOR_GATE_00 "220 Ohms" "RES 0603_1608" 78.028,111.806 r270 top (schematic designator R10)
R10_U_XOR_GATE_02 "220 Ohms" "RES 0603_1608" 77.24,82.184 r270 top (schematic designator R10)
R10_U_XOR_GATE_32 "220 Ohms" "RES 0603_1608" 107.684,82.042 r270 top (schematic designator R10)
R11_U_XOR_GATE_00 "1 kOhms" "RES 0603_1608" 71.162,115.22 r180 top (schematic designator R11)
R11_U_XOR_GATE_02 "1 kOhms" "RES 0603_1608" 70.374,85.598 r180 top (schematic designator R11)
R11_U_XOR_GATE_32 "1 kOhms" "RES 0603_1608" 100.818,85.456 r180 top (schematic designator R11)
R12_U_XOR_GATE_00 "1 kOhms" "RES 0603_1608" 74.599,109.012 r0 top (schematic designator R12)
R12_U_XOR_GATE_02 "1 kOhms" "RES 0603_1608" 73.811,79.39 r0 top (schematic designator R12)
R12_U_XOR_GATE_32 "1 kOhms" "RES 0603_1608" 104.255,79.248 r0 top (schematic designator R12)
R13_U_XOR_GATE_00 "1 kOhms" "RES 0603_1608" 74.276,114.854 r270 top (schematic designator R13)
R13_U_XOR_GATE_02 "1 kOhms" "RES 0603_1608" 73.488,85.232 r270 top (schematic designator R13)
R13_U_XOR_GATE_32 "1 kOhms" "RES 0603_1608" 103.932,85.09 r270 top (schematic designator R13)
R14_U_XOR_GATE_00 "1 kOhms" "RES 0603_1608" 74.718,107.092 r0 top (schematic designator R14)
R14_U_XOR_GATE_02 "1 kOhms" "RES 0603_1608" 73.93,77.47 r0 top (schematic designator R14)
R14_U_XOR_GATE_32 "1 kOhms" "RES 0603_1608" 104.374,77.328 r0 top (schematic designator R14)
R15_U_XOR_GATE_00 "1 kOhms" "RES 0603_1608" 67.606,114.092 r0 top (schematic designator R15)
R15_U_XOR_GATE_02 "1 kOhms" "RES 0603_1608" 66.818,84.47 r0 top (schematic designator R15)
R15_U_XOR_GATE_32 "1 kOhms" "RES 0603_1608" 97.262,84.328 r0 top (schematic designator R15)
R16_U_XOR_GATE_00 "1 kOhms" "RES 0603_1608" 67.606,112.314 r0 top (schematic designator R16)
R16_U_XOR_GATE_02 "1 kOhms" "RES 0603_1608" 66.818,82.692 r0 top (schematic designator R16)
R16_U_XOR_GATE_32 "1 kOhms" "RES 0603_1608" 97.262,82.55 r0 top (schematic designator R16)
RO1 "220 Ohms" "RES 0603_1608" 101.966,104.14 r180 top
RO2_U_NOR_GATE_01 "220 Ohms" "RES 0603_1608" 74.438,92.344 r180 top (schematic designator RO2)
RO2_U_NOR_GATE_10 "220 Ohms" "RES 0603_1608" 88.662,92.598 r180 top (schematic designator RO2)
RO2_U_NOR_GATE_20 "220 Ohms" "RES 0603_1608" 89.916,107.33 r180 top (schematic designator RO2)
RO2_U_NOR_GATE_30 "220 Ohms" "RES 0603_1608" 103.394,107.33 r180 top (schematic designator RO2)
RO3 "220 Ohms" "RES 0603_1608" 89.916,88.584 r90 top
Y_D1 "Red" "LED 0603_1608 RED" 105.664,98.298 r270 top
Y_D2_U_NOR_GATE_01 "Red" "LED 0603_1608 RED" 77.42,98.552 r90 top (schematic designator Y_D2)
Y_D2_U_NOR_GATE_10 "Red" "LED 0603_1608 RED" 91.644,98.806 r90 top (schematic designator Y_D2)
Y_D2_U_NOR_GATE_20 "Red" "LED 0603_1608 RED" 92.898,113.538 r90 top (schematic designator Y_D2)
Y_D2_U_NOR_GATE_30 "Red" "LED 0603_1608 RED" 106.376,113.538 r90 top (schematic designator Y_D2)
Y_D3 "Red" "LED 0603_1608 RED" 91.948,78.982 r90 top
Y_D4_U_XOR_GATE_00 "Red" "LED 0603_1608 RED" 78.028,106.98 r0 top (schematic designator Y_D4)
Y_D4_U_XOR_GATE_02 "Red" "LED 0603_1608 RED" 77.24,77.358 r0 top (schematic designator Y_D4)
Y_D4_U_XOR_GATE_32 "Red" "LED 0603_1608 RED" 107.684,77.216 r0 top (schematic designator Y_D4)
Y_Q1 "#NAME?" "MCCSEMI SOT-23-3" 105.776,92.952 r0 top
Y_Q2_U_NOR_GATE_01 "#NAME?" "MCCSEMI SOT-23-3" 76.47,102.108 r90 top (schematic designator Y_Q2)
Y_Q2_U_NOR_GATE_10 "#NAME?" "MCCSEMI SOT-23-3" 90.694,102.362 r90 top (schematic designator Y_Q2)
Y_Q2_U_NOR_GATE_20 "#NAME?" "MCCSEMI SOT-23-3" 91.948,117.094 r90 top (schematic designator Y_Q2)
Y_Q2_U_NOR_GATE_30 "#NAME?" "MCCSEMI SOT-23-3" 105.426,117.094 r90 top (schematic designator Y_Q2)
Y_Q3 "#NAME?" "MCCSEMI SOT-23-3" 91.186,82.488 r0 top
Y_Q4_U_XOR_GATE_00 "#NAME?" "MCCSEMI SOT-23-3" 78.282,118.852 r90 top (schematic designator Y_Q4)
Y_Q4_U_XOR_GATE_02 "#NAME?" "MCCSEMI SOT-23-3" 77.494,89.23 r90 top (schematic designator Y_Q4)
Y_Q4_U_XOR_GATE_32 "#NAME?" "MCCSEMI SOT-23-3" 107.938,89.088 r90 top (schematic designator Y_Q4)
Y_R1 "1 kOhms" "RES 0603_1608" 105.522,95.57 r180 top
Y_R2_U_NOR_GATE_01 "1 kOhms" "RES 0603_1608" 73.788,101.854 r270 top (schematic designator Y_R2)
Y_R2_U_NOR_GATE_10 "1 kOhms" "RES 0603_1608" 88.012,102.108 r270 top (schematic designator Y_R2)
Y_R2_U_NOR_GATE_20 "1 kOhms" "RES 0603_1608" 89.266,116.84 r270 top (schematic designator Y_R2)
Y_R2_U_NOR_GATE_30 "1 kOhms" "RES 0603_1608" 102.744,116.84 r270 top (schematic designator Y_R2)
Y_R3 "1 kOhms" "RES 0603_1608" 89.916,85.79 r90 top
Y_R4_U_XOR_GATE_00 "1 kOhms" "RES 0603_1608" 75.734,118.41 r270 top (schematic designator Y_R4)
Y_R4_U_XOR_GATE_02 "1 kOhms" "RES 0603_1608" 74.946,88.788 r270 top (schematic designator Y_R4)
Y_R4_U_XOR_GATE_32 "1 kOhms" "RES 0603_1608" 105.39,88.646 r270 top (schematic designator Y_R4)
Y_RD1 "330 Ohms" "RES 0603_1608" 105.776,100.838 r180 top
Y_RD2_U_NOR_GATE_01 "330 Ohms" "RES 0603_1608" 74.438,104.282 r0 top (schematic designator Y_RD2)
Y_RD2_U_NOR_GATE_10 "330 Ohms" "RES 0603_1608" 88.662,104.536 r0 top (schematic designator Y_RD2)
Y_RD2_U_NOR_GATE_20 "330 Ohms" "RES 0603_1608" 89.916,119.268 r0 top (schematic designator Y_RD2)
Y_RD2_U_NOR_GATE_30 "330 Ohms" "RES 0603_1608" 103.394,119.268 r0 top (schematic designator Y_RD2)
Y_RD3 "330 Ohms" "RES 0603_1608" 90.186,79.186 r270 top
Y_RD4_U_XOR_GATE_00 "330 Ohms" "RES 0603_1608" 78.02,108.758 r180 top (schematic designator Y_RD4)
Y_RD4_U_XOR_GATE_02 "330 Ohms" "RES 0603_1608" 77.232,79.136 r180 top (schematic designator Y_RD4)
Y_RD4_U_XOR_GATE_32 "330 Ohms" "RES 0603_1608" 107.676,78.994 r180 top (schematic designator Y_RD4)

## Footprints (in the part's own frame and the unit in brackets; to place one, negate y for a bottom-side part, rotate by r counter-clockwise, add the part's x,y. Pads: shape width x height; smd on the part's side, far side on the other; paste and mask are expansions set on the pad)
2.54mm_TH_1x8_pin_header [mm]
  round 1.8 hole 0.9: 1(-7.62,0) 2(-5.08,0) 3(-2.54,0) 4(0,0) 5(2.54,0) 6(5.08,0) 7(7.62,0) 8(10.16,0)
  silkscreen extent -8.89,-1.27 11.43,1.27, body extent -8.89,-1.25 11.43,1.25, height 8.6
"LED 0603_1608 BLUE" [mm] "Chip Diode, 2-Leads, Body 1.60x0.80mm, IPC Medium Density"
  rect 0.8x0.8 smd: 1(-0.75,0) 2(0.75,0)
  silkscreen extent -1.52,-0.7 1.52,0.7, body extent -0.8,-0.4 0.8,0.4, height 0.53
"LED 0603_1608 RED" [mm] "Chip Diode, 2-Leads, Body 1.60x0.80mm, IPC Medium Density"
  rect 0.8x0.8 smd: 1(-0.75,0) 2(0.75,0)
  silkscreen extent -1.52,-0.7 1.52,0.7, body extent -0.8,-0.4 0.8,0.4, height 0.53
"MCCSEMI SOT-23-3" [mm] "SOT23, 3-Leads, Body 2.92x2.37mm, Pitch 0.95mm, IPC Medium Density"
  rect 0.9x0.8 smd: 1(-1,0.95) 2(-1,-0.95) 3(1,0)
  silkscreen extent -0.7,-1.45 0.7,1.45, body extent -1.16,-1.45 1.16,1.45, height 1.5
"RES 0603_1608" [mm] "Chip Resistor, 2-Leads, Body 1.60x0.80mm, IPC Medium Density"
  rect 0.85x0.95 smd: 1(-0.65,0) 2(0.65,0)
  silkscreen extent -1.27,-0.7 1.27,0.7, body extent -0.8,-0.4 0.8,0.4, height 0.45

## Part data
AIN_D1 AIN_D2_U_NOR_GATE_01 AIN_D2_U_NOR_GATE_10 AIN_D2_U_NOR_GATE_20 AIN_D2_U_NOR_GATE_30 AIN_D3 AIN_D4_U_XOR_GATE_00 AIN_D4_U_XOR_GATE_02 AIN_D4_U_XOR_GATE_32 BIN_D1 BIN_D2_U_NOR_GATE_01 BIN_D2_U_NOR_GATE_10 BIN_D2_U_NOR_GATE_20 BIN_D2_U_NOR_GATE_30 BIN_D3 BIN_D4_U_XOR_GATE_00 BIN_D4_U_XOR_GATE_02 BIN_D4_U_XOR_GATE_32: library part IN-S63AT5B, "LED BLUE CLEAR 0603 SMD", Current - Test=5mA, Device Package="0603 (1608 Metric)", Lens Color=Clear, Manufacturer=Inolux, Millicandela Rating=45mcd, Supplier Device Package=0603, Supplier Part Number 1=1830-1061-1-ND, Voltage - Forward (Vf) (Typ)=2.8V, Color=Blue, ComponentLink1Description=Datasheet, ComponentLink1URL=http://www.inolux-corp.com/datasheet/SMDLED/Mono%20Color%20Top%20View/IN-S63AT%20Series_V1.1.pdf, ComponentLink2Description="DigiKey Link", ComponentLink2URL=https://www.digikey.com/en/products/detail/inolux/IN-S63AT5B/7604929, Configuration=Standard, Height (Max)=0.40mm, LastUpdated="6/3/2024 7:57:52 PM", Lens Size="1.15mm x 0.80mm", Lens Style="Rectangle with Flat Top", Lens Transparency=Clear, Lifecycle Status=Active, Minimum Order=1, Mounting Type="Surface Mount", Package / Case="0603 (1608 Metric)", Packaging=TapeAndReel, PartId=834, Part Number=IN-S63AT5B, Part Status=Active, Price=0.03, Series=IN-S63AT, Size / Dimension="1.60mm L x 0.80mm W", Supplier 1=DigiKey, Viewing Angle=120°, Wavelength - Dominant=470nm, Wavelength - Peak=468nm
AIN_Q1 AIN_Q2_U_NOR_GATE_01 AIN_Q2_U_NOR_GATE_10 AIN_Q2_U_NOR_GATE_20 AIN_Q2_U_NOR_GATE_30 AIN_Q3 AIN_Q4_U_XOR_GATE_00 AIN_Q4_U_XOR_GATE_02 AIN_Q4_U_XOR_GATE_32 BIN_Q1 BIN_Q2_U_NOR_GATE_01 BIN_Q2_U_NOR_GATE_10 BIN_Q2_U_NOR_GATE_20 BIN_Q2_U_NOR_GATE_30 BIN_Q3 BIN_Q4_U_XOR_GATE_00 BIN_Q4_U_XOR_GATE_02 BIN_Q4_U_XOR_GATE_32 Q1 Q2 Q3 Q4_U_NOR_GATE_01 Q4_U_NOR_GATE_10 Q4_U_NOR_GATE_20 Q4_U_NOR_GATE_30 Q5_U_NOR_GATE_01 Q5_U_NOR_GATE_10 Q5_U_NOR_GATE_20 Q5_U_NOR_GATE_30 Q6 Q7 Q8 Q9_U_XOR_GATE_00 Q9_U_XOR_GATE_02 Q9_U_XOR_GATE_32 Q10_U_XOR_GATE_00 Q10_U_XOR_GATE_02 Q10_U_XOR_GATE_32 Q11_U_XOR_GATE_00 Q11_U_XOR_GATE_02 Q11_U_XOR_GATE_32 Q12_U_XOR_GATE_00 Q12_U_XOR_GATE_02 Q12_U_XOR_GATE_32 Q13_U_XOR_GATE_00 Q13_U_XOR_GATE_02 Q13_U_XOR_GATE_32 Y_Q1 Y_Q2_U_NOR_GATE_01 Y_Q2_U_NOR_GATE_10 Y_Q2_U_NOR_GATE_20 Y_Q2_U_NOR_GATE_30 Y_Q3 Y_Q4_U_XOR_GATE_00 Y_Q4_U_XOR_GATE_02 Y_Q4_U_XOR_GATE_32: library part MMSS8050-L-TP, "TRANS NPN 25V 1.5A SOT23", Current - Collector (Ic) (Max)="1.5 A", Current - Collector Cutoff (Max)=100nA, DC Current Gain (hFE) (Min) @ Ic, Vce="120 @ 100mA, 1V", Frequency - Transition=100MHz, Manufacturer="Micro Commercial Co", Operating Temperature="-55°C ~ 150°C (TJ)", Package / Case="TO-236-3, SC-59, SOT-23-3", Power - Max="625 mW", Supplier Device Package=SOT-23, Supplier Part Number 1=MMSS8050-L-TPMSCT-ND, Voltage - Collector Emitter Breakdown (Max)="25 V", ComponentLink1Description=Datasheet, ComponentLink1URL=https://www.mccsemi.com/pdf/Products/MMSS8050(SOT-23).pdf, ComponentLink2Description="DigiKey Link", ComponentLink2URL=https://www.digikey.com/en/products/detail/micro-commercial-co/MMSS8050-L-TP/2827197, LastUpdated="6/3/2024 8:24:16 PM", Lifecycle Status=Active, Minimum Order=1, Mounting Type="Surface Mount", Packaging=TapeAndReel, PartId=278, Part Number=MMSS8050-L-TP, Part Status=Active, Price=0.01, Series=-, Supplier 1=DigiKey, Transistor Type=NPN, Vce Saturation (Max) @ Ib, Ic="500mV @ 80mA, 800mA"
AIN_R1 AIN_R2_U_NOR_GATE_01 AIN_R2_U_NOR_GATE_10 AIN_R2_U_NOR_GATE_20 AIN_R2_U_NOR_GATE_30 AIN_R3 AIN_R4_U_XOR_GATE_00 AIN_R4_U_XOR_GATE_02 AIN_R4_U_XOR_GATE_32 BIN_R1 BIN_R2_U_NOR_GATE_01 BIN_R2_U_NOR_GATE_10 BIN_R2_U_NOR_GATE_20 BIN_R2_U_NOR_GATE_30 BIN_R3 BIN_R4_U_XOR_GATE_00 BIN_R4_U_XOR_GATE_02 BIN_R4_U_XOR_GATE_32 R1 R2 R3 R4_U_NOR_GATE_01 R4_U_NOR_GATE_10 R4_U_NOR_GATE_20 R4_U_NOR_GATE_30 R5_U_NOR_GATE_01 R5_U_NOR_GATE_10 R5_U_NOR_GATE_20 R5_U_NOR_GATE_30 R6 R7 R8 R9_U_XOR_GATE_00 R9_U_XOR_GATE_02 R9_U_XOR_GATE_32 R11_U_XOR_GATE_00 R11_U_XOR_GATE_02 R11_U_XOR_GATE_32 R12_U_XOR_GATE_00 R12_U_XOR_GATE_02 R12_U_XOR_GATE_32 R13_U_XOR_GATE_00 R13_U_XOR_GATE_02 R13_U_XOR_GATE_32 R14_U_XOR_GATE_00 R14_U_XOR_GATE_02 R14_U_XOR_GATE_32 R15_U_XOR_GATE_00 R15_U_XOR_GATE_02 R15_U_XOR_GATE_32 R16_U_XOR_GATE_00 R16_U_XOR_GATE_02 R16_U_XOR_GATE_32 Y_R1 Y_R2_U_NOR_GATE_01 Y_R2_U_NOR_GATE_10 Y_R2_U_NOR_GATE_20 Y_R2_U_NOR_GATE_30 Y_R3 Y_R4_U_XOR_GATE_00 Y_R4_U_XOR_GATE_02 Y_R4_U_XOR_GATE_32: library part CPF0603B1K0E, "RES SMD 1K OHM 0.1% 1/16W 0603", Device Package="0603 (1608 Metric)", Manufacturer="TE Connectivity Passive Product", Operating Temperature="-55°C ~ 155°C", Power (Watts)="0.063W, 1/16W", Supplier Device Package=0603, Supplier Part Number 1=A119887CT-ND, Temperature Coefficient=±25ppm/°C, Tolerance=±0.1%, ComponentLink1Description=Datasheet, ComponentLink1URL=https://www.te.com/commerce/DocumentDelivery/DDEController?Action=srchrtrv&DocNm=1773200&DocType=DS&DocLang=English, ComponentLink2Description="DigiKey Link", ComponentLink2URL=https://www.digikey.com/en/products/detail/te-connectivity-passive-product/CPF0603B1K0E/2390473, Composition="Thin Film", Height - Seated (Max)="0.022\" (0.55mm)", LastUpdated="2/9/2024 8:43:37 PM", Lifecycle Status=Active, Minimum Order=1, Number of Terminations=2, Package / Case="0603 (1608 Metric)", Packaging=TapeAndReel, PartId=4877, Part Number=CPF0603B1K0E, Part Status=Active, Price=0.09, Resistance="1 kOhms", Series="CPF, Neohm", Size / Dimension="0.061\" L x 0.031\" W (1.55mm x 0.80mm)", Supplier 1=DigiKey
AIN_RD1 AIN_RD2_U_NOR_GATE_01 AIN_RD2_U_NOR_GATE_10 AIN_RD2_U_NOR_GATE_20 AIN_RD2_U_NOR_GATE_30 AIN_RD3 AIN_RD4_U_XOR_GATE_00 AIN_RD4_U_XOR_GATE_02 AIN_RD4_U_XOR_GATE_32 BIN_RD1 BIN_RD2_U_NOR_GATE_01 BIN_RD2_U_NOR_GATE_10 BIN_RD2_U_NOR_GATE_20 BIN_RD2_U_NOR_GATE_30 BIN_RD3 BIN_RD4_U_XOR_GATE_00 BIN_RD4_U_XOR_GATE_02 BIN_RD4_U_XOR_GATE_32 Y_RD1 Y_RD2_U_NOR_GATE_01 Y_RD2_U_NOR_GATE_10 Y_RD2_U_NOR_GATE_20 Y_RD2_U_NOR_GATE_30 Y_RD3 Y_RD4_U_XOR_GATE_00 Y_RD4_U_XOR_GATE_02 Y_RD4_U_XOR_GATE_32: library part RMCF0603JT330R, "RES 330 OHM 5% 1/10W 0603", Device Package="0603 (1608 Metric)", Manufacturer="Stackpole Electronics Inc", Operating Temperature="-55°C ~ 155°C", Power (Watts)="0.1W, 1/10W", Ratings=AEC-Q200, Supplier Device Package=0603, Supplier Part Number 1=RMCF0603JT330RCT-ND, Temperature Coefficient=±200ppm/°C, Tolerance=±5%, ComponentLink1Description=Datasheet, ComponentLink1URL=https://www.seielect.com/catalog/sei-rmcf_rmcp.pdf, ComponentLink2Description="DigiKey Link", ComponentLink2URL=https://www.digikey.com/en/products/detail/stackpole-electronics-inc/RMCF0603JT330R/1757998, Composition="Thick Film", Features="Automotive AEC-Q200", Height - Seated (Max)="0.022\" (0.55mm)", LastUpdated="2/9/2024 8:43:33 PM", Lifecycle Status=Active, Minimum Order=1, Number of Terminations=2, Package / Case="0603 (1608 Metric)", Packaging=CutTape, PartId=5841, Part Number=RMCF0603JT330R, Part Status=Active, Price=0.01, Resistance="330 Ohms", Series=RMCF, Size / Dimension="0.061\" L x 0.031\" W (1.55mm x 0.80mm)", Supplier 1=DigiKey
R10_U_XOR_GATE_00 R10_U_XOR_GATE_02 R10_U_XOR_GATE_32 RO1 RO2_U_NOR_GATE_01 RO2_U_NOR_GATE_10 RO2_U_NOR_GATE_20 RO2_U_NOR_GATE_30 RO3: library part ERA-3AED221V, "RES SMD 220 OHM 0.5% 1/10W 0603", Device Package="0603 (1608 Metric)", Manufacturer="Panasonic Electronic Components", Operating Temperature="-55°C ~ 155°C", Power (Watts)="0.1W, 1/10W", Ratings=AEC-Q200, Supplier Device Package=0603, Supplier Part Number 1=P123752CT-ND, Temperature Coefficient=±25ppm/°C, Tolerance=±0.5%, ComponentLink1Description=Datasheet, ComponentLink1URL=https://industrial.panasonic.com/cdbs/www-data/pdf/RDM0000/AOA0000C307.pdf, ComponentLink2Description="DigiKey Link", ComponentLink2URL=https://www.digikey.com/en/products/detail/panasonic-electronic-components/ERA-3AED221V/9373509, Composition="Thin Film", Features="Automotive AEC-Q200", Height - Seated (Max)="0.022\" (0.55mm)", LastUpdated="2/9/2024 8:43:36 PM", Lifecycle Status=Active, Minimum Order=1, Number of Terminations=2, Package / Case="0603 (1608 Metric)", Packaging=TapeAndReel, PartId=4952, Part Number=ERA-3AED221V, Part Status=Active, Price=0.03, Resistance="220 Ohms", Series=ERA-3A, Size / Dimension="0.063\" L x 0.031\" W (1.60mm x 0.80mm)", Supplier 1=DigiKey
Y_D1 Y_D2_U_NOR_GATE_01 Y_D2_U_NOR_GATE_10 Y_D2_U_NOR_GATE_20 Y_D2_U_NOR_GATE_30 Y_D3 Y_D4_U_XOR_GATE_00 Y_D4_U_XOR_GATE_02 Y_D4_U_XOR_GATE_32: library part XZMDK53W-8, "LED RED CLEAR CHIP SMD", Current - Test=20mA, Device Package="0603 (1608 Metric)", Lens Color=Colorless, Manufacturer=SunLED, Millicandela Rating=248mcd, Supplier Device Package="Chip LED", Supplier Part Number 1=1497-1169-6-ND, Voltage - Forward (Vf) (Typ)=1.95V, Color=Red, ComponentLink1Description=Datasheet, ComponentLink1URL=https://www.sunledusa.com/products/spec/XZMDK53W-8.pdf, ComponentLink2Description="DigiKey Link", ComponentLink2URL=https://www.digikey.com/en/products/detail/sunled/XZMDK53W-8/4745952, Configuration=Standard, Height (Max)=0.95mm, LastUpdated="6/3/2024 7:59:48 PM", Lens Size="0.35mm Dia", Lens Style="Round with Domed Top", Lens Transparency=Clear, Lifecycle Status=Active, Minimum Order=1, Mounting Type="Surface Mount", Package / Case="0603 (1608 Metric)", Packaging=TapeAndReel, PartId=401, Part Number=XZMDK53W-8, Part Status=Active, Price=0.06, Series=PixsoLED, Size / Dimension="1.60mm L x 0.80mm W", Supplier 1=DigiKey, Viewing Angle=60°, Wavelength - Dominant=630nm, Wavelength - Peak=645nm

## Via types
v1: diameter 0.5, hole 0.3, Top Layer to Bottom Layer, 125 vias

## Nets (pads, with @x,y where several pads share a name; then routed paths per layer and width w, separated by ;. In a path a pad name is that pad's centre, name@x,y a point inside that pad or via, vN(x,y) a via of type N, cw(c..) or ccw(c..) an arc to the next point about the centre after c; other vN are vias at no path point)
+5: AIN_RD1.1 AIN_RD2_U_NOR_GATE_01.1 AIN_RD2_U_NOR_GATE_10.1 AIN_RD2_U_NOR_GATE_20.1 AIN_RD2_U_NOR_GATE_30.1 AIN_RD3.1 AIN_RD4_U_XOR_GATE_00.1 AIN_RD4_U_XOR_GATE_02.1 AIN_RD4_U_XOR_GATE_32.1 BIN_RD1.1 BIN_RD2_U_NOR_GATE_01.1 BIN_RD2_U_NOR_GATE_10.1 BIN_RD2_U_NOR_GATE_20.1 BIN_RD2_U_NOR_GATE_30.1 BIN_RD3.1 BIN_RD4_U_XOR_GATE_00.1 BIN_RD4_U_XOR_GATE_02.1 BIN_RD4_U_XOR_GATE_32.1 IN.1 IN.2 OUT.1 OUT.2 R1.2 R7.2 R9_U_XOR_GATE_00.2 R9_U_XOR_GATE_02.2 R9_U_XOR_GATE_32.2 R10_U_XOR_GATE_00.2 R10_U_XOR_GATE_02.2 R10_U_XOR_GATE_32.2 R13_U_XOR_GATE_00.2 R13_U_XOR_GATE_02.2 R13_U_XOR_GATE_32.2 R14_U_XOR_GATE_00.2 R14_U_XOR_GATE_02.2 R14_U_XOR_GATE_32.2 RO1.2 RO2_U_NOR_GATE_01.2 RO2_U_NOR_GATE_10.2 RO2_U_NOR_GATE_20.2 RO2_U_NOR_GATE_30.2 RO3.2 Y_RD1.1 Y_RD2_U_NOR_GATE_01.1 Y_RD2_U_NOR_GATE_10.1 Y_RD2_U_NOR_GATE_20.1 Y_RD2_U_NOR_GATE_30.1 Y_RD3.1 Y_RD4_U_XOR_GATE_00.1 Y_RD4_U_XOR_GATE_02.1 Y_RD4_U_XOR_GATE_32.1 | length 59
  Top Layer w0.254: v1(63.524,78.77) BIN_RD4_U_XOR_GATE_02.1@64.54,78.77 ; v1(63.524,88.392) 64.348,88.392 64.444,88.488 AIN_RD4_U_XOR_GATE_02.1@64.54,88.392 ; v1(64.312,108.392) BIN_RD4_U_XOR_GATE_00.1@65.328,108.392 ; v1(64.312,118.014) 65.136,118.014 65.232,118.11 AIN_RD4_U_XOR_GATE_00.1@65.328,118.014 ; v1(67.326,102.982) AIN_RD2_U_NOR_GATE_01.1@68.53,102.982 ; v1(67.58,93.36) BIN_RD2_U_NOR_GATE_01.1@68.592,93.36 ; R9_U_XOR_GATE_02.2@72.898,89.708 R9_U_XOR_GATE_02.2@73.168,89.438 73.168,90.566 v1(73.788,91.186) RO2_U_NOR_GATE_01.2@73.788,92.344 ; v1(73.488,83.662) R13_U_XOR_GATE_02.2@73.488,84.582 ; Y_RD2_U_NOR_GATE_01.1@73.788,104.282 v1(73.788,105.41) 74.296,105.918 74.692,105.918 75.07,106.296 75.07,106.794 R14_U_XOR_GATE_00.2@75.368,107.092 ; v1(73.949,120.142) 73.949,119.067 R9_U_XOR_GATE_00.2@73.956,119.06 ; v1(74.276,113.284) R13_U_XOR_GATE_00.2@74.276,114.204 ; v1(74.58,76.296) R14_U_XOR_GATE_02.2@74.58,77.47 ; R10_U_XOR_GATE_02.2@77.24,81.534 v1(78.436,81.534) ; Y_RD4_U_XOR_GATE_02.1@77.882,79.136 78.436,79.69 v1(78.436,80.152) ; R10_U_XOR_GATE_00.2@78.028,111.156 v1(79.224,111.156) ; Y_RD4_U_XOR_GATE_00.1@78.67,108.758 79.386,109.474 v1(79.756,109.474) ; v1(80.168,78.566) BIN_RD3.1@81.28,78.566 ; v1(80.264,88.433) 81.035,88.433 AIN_RD3.1@81.28,88.188 ; v1(81.55,103.236) AIN_RD2_U_NOR_GATE_10.1@82.754,103.236 ; v1(81.804,93.614) BIN_RD2_U_NOR_GATE_10.1@82.816,93.614 ; v1(82.804,117.968) AIN_RD2_U_NOR_GATE_20.1@84.008,117.968 ; v1(83.058,108.346) BIN_RD2_U_NOR_GATE_20.1@84.07,108.346 ; v1(85.717,85.028) R7.2@86.726,85.028 ; v1(88.012,91.44) RO2_U_NOR_GATE_10.2@88.012,92.598 ; Y_RD2_U_NOR_GATE_10.1@88.012,104.536 v1(88.012,105.664) 88.758,105.664 89.266,106.172 RO2_U_NOR_GATE_20.2@89.266,107.33 ; v1(89.154,79.836) Y_RD3.1@90.186,79.836 ; Y_RD2_U_NOR_GATE_20.1@89.266,119.268 v1(89.266,120.396) ; RO3.2@89.916,89.234 v1(91.186,89.234) ; v1(93.968,78.628) BIN_RD4_U_XOR_GATE_32.1@94.984,78.628 ; v1(93.968,88.25) 94.792,88.25 94.888,88.346 AIN_RD4_U_XOR_GATE_32.1@94.984,88.25 ; v1(94.854,93.106) BIN_RD1.1@96.124,93.106 ; v1(94.854,102.84) AIN_RD1.1@96.124,102.84 ; v1(96.282,117.968) AIN_RD2_U_NOR_GATE_30.1@97.486,117.968 ; v1(96.536,108.346) BIN_RD2_U_NOR_GATE_30.1@97.548,108.346 ; v1(100.346,99.568) 100.808,99.568 R1.2@101.316,99.06 ; RO1.2@101.316,104.14 v1(101.316,105.156) 101.824,105.664 102.236,105.664 102.744,106.172 RO2_U_NOR_GATE_30.2@102.744,107.33 ; Y_RD2_U_NOR_GATE_30.1@102.744,119.268 v1(102.744,120.396) ; v1(103.605,90.378) 103.605,89.303 R9_U_XOR_GATE_32.2@103.612,89.296 ; v1(103.932,83.52) R13_U_XOR_GATE_32.2@103.932,84.44 ; v1(105.024,76.154) R14_U_XOR_GATE_32.2@105.024,77.328 ; Y_RD1.1@106.426,100.838 v1(106.426,102.108) ; R10_U_XOR_GATE_32.2@107.684,81.392 v1(108.88,81.392) ; Y_RD4_U_XOR_GATE_32.1@108.326,78.994 108.88,79.548 v1(108.88,80.152)
DIN1: AIN_R4_U_XOR_GATE_00.2 BIN_R4_U_XOR_GATE_32.2 IN.6 R15_U_XOR_GATE_00.1 R16_U_XOR_GATE_32.1 | length 69.8
  Top Layer w0.254: IN.6@60.96,93.98 64.448,93.98 v1(65.532,92.896) ; v1(64.726,113.836) 64.726,113.903 64.98,114.157 64.98,114.922 65.278,115.22 65.378,115.22 66.158,114.44 66.658,114.44 66.956,114.142 R15_U_XOR_GATE_00.1@66.956,114.092 ; v1(93.726,81.788) 93.762,81.788 94.128,81.422 BIN_R4_U_XOR_GATE_32.2@94.984,81.422 95.034,81.422 95.814,82.202 96.314,82.202 96.612,82.5 R16_U_XOR_GATE_32.1@96.612,82.55
  Bottom Layer w0.254: v1(64.726,113.836) 64.726,113.298 65.532,112.492 v1(65.532,92.896) 67.627,90.801 73.159,90.801 73.405,90.555 90.757,90.555 93.218,88.094 93.218,82.296 v1(93.726,81.788)
DIN2: BIN_R2_U_NOR_GATE_30.2 BIN_R4_U_XOR_GATE_02.2 IN.5 R5_U_NOR_GATE_30.1 R16_U_XOR_GATE_02.1 | length 65.6
  Top Layer w0.254: IN.5@60.96,96.52 64.062,96.52 v1(64.682,95.9) 65.757,95.9 v1(66.33,96.473) ; v1(63.246,82.55) 63.246,81.949 63.631,81.564 BIN_R4_U_XOR_GATE_02.2@64.54,81.564 64.59,81.564 65.37,82.344 65.87,82.344 66.168,82.642 R16_U_XOR_GATE_02.1@66.168,82.692 ; v1(95.758,110.744) 95.825,110.744 96.221,111.14 BIN_R2_U_NOR_GATE_30.2@97.548,111.14 97.598,111.14 98.378,111.92 98.89,111.92 99.188,112.218 R5_U_NOR_GATE_30.1@99.188,112.268
  Bottom Layer w0.254: v1(63.246,82.55) 64.682,83.986 v1(64.682,95.9) ; v1(66.33,96.473) 68.917,99.06 78.42,99.06 81.976,102.616 86.614,102.616 87.884,103.886 92.71,103.886 94.488,105.664 94.488,109.474 v1(95.758,110.744)
DIN3: BIN_R2_U_NOR_GATE_01.2 IN.4 R5_U_NOR_GATE_01.1 | length 11
  Top Layer w0.254: IN.4@60.96,99.06 64.076,99.06 64.838,98.298 66.398,98.298 68.542,96.154 BIN_R2_U_NOR_GATE_01.2@68.592,96.154 68.642,96.154 69.422,96.934 69.934,96.934 70.232,97.232 R5_U_NOR_GATE_01.1@70.232,97.282
DIN4: AIN_R2_U_NOR_GATE_01.2 AIN_R4_U_XOR_GATE_02.2 BIN_R4_U_XOR_GATE_00.2 IN.3 R4_U_NOR_GATE_01.1 R15_U_XOR_GATE_02.1 R16_U_XOR_GATE_00.1 | length 45.8
  Top Layer w0.254: IN.3@60.96,101.6 63.638,101.6 ; v1(62.992,85.74) 64.398,85.74 AIN_R4_U_XOR_GATE_02.2@64.54,85.598 64.59,85.598 65.37,84.818 65.87,84.818 66.168,84.52 R15_U_XOR_GATE_02.1@66.168,84.47 ; v1(63.5,110.724) 63.962,111.186 BIN_R4_U_XOR_GATE_00.2@65.328,111.186 65.378,111.186 66.158,111.966 66.658,111.966 66.956,112.264 R16_U_XOR_GATE_00.1@66.956,112.314 ; v1(64.312,102.758) 64.312,102.274 63.638,101.6 ; R4_U_NOR_GATE_01.1@70.232,99.06 70.232,99.11 69.934,99.408 69.318,99.408 68.58,100.146 AIN_R2_U_NOR_GATE_01.2@68.53,100.146 65.092,100.146 63.638,101.6
  Bottom Layer w0.254: v1(62.992,85.74) 62.992,85.807 62.893,85.906 62.893,91.26 63.5,91.867 63.5,98.438 64.312,99.25 v1(64.312,102.758) 64.312,105.868 63.246,106.934 63.246,110.47 v1(63.5,110.724)
DO1: OUT.6 Q12_U_XOR_GATE_32.3 R10_U_XOR_GATE_32.1 Y_R4_U_XOR_GATE_32.2 | length 19.8
  Top Layer w0.254: Y_R4_U_XOR_GATE_32.2@105.39,87.996 105.44,87.996 106.179,87.257 106.452,87.257 107.591,86.118 107.591,85.729 107.864,85.456 Q12_U_XOR_GATE_32.3@107.914,85.456 ; R10_U_XOR_GATE_32.1@107.684,82.692 107.914,82.922 Q12_U_XOR_GATE_32.3@107.914,85.456 ; OUT.6@111.76,93.98 109.47,93.98 108.712,93.222 108.712,91.862 109.839,90.735 109.839,86.06 109.235,85.456 Q12_U_XOR_GATE_32.3@107.914,85.456
DO2: OUT.5 Q2.3 RO1.1 Y_R1.2 | length 23.8
  Top Layer w0.254: RO1.1@102.616,104.14 102.914,103.842 102.914,102.703 103.236,102.381 Q2.3@103.236,101.6 Q2.3@103.286,101.6 ; Y_R1.2@104.872,95.57 104.574,95.868 104.574,98.453 103.998,99.029 103.998,100.838 103.559,101.277 103.559,101.327 Q2.3@103.286,101.6 ; OUT.5@111.76,96.52 109.368,96.52 107.591,98.297 107.591,102.423 106.906,103.108 104.794,103.108 Q2.3@103.286,101.6
DO3: OUT.4 Q4_U_NOR_GATE_30.3 Q5_U_NOR_GATE_30.3 RO2_U_NOR_GATE_30.1 Y_R2_U_NOR_GATE_30.2 | length 26.3
  Top Layer w0.254: Y_R2_U_NOR_GATE_30.2@102.744,116.19 102.794,116.19 104.648,114.336 Q4_U_NOR_GATE_30.3@104.648,113.538 Q5_U_NOR_GATE_30.3@104.648,109.982 ; RO2_U_NOR_GATE_30.1@104.044,107.33 104.342,107.628 104.342,108.895 104.648,109.201 Q5_U_NOR_GATE_30.3@104.648,109.982 ; OUT.4@111.76,99.06 109.088,99.06 108.326,99.822 108.326,107.863 106.207,109.982 Q5_U_NOR_GATE_30.3@104.648,109.982
DO4: AIN_R4_U_XOR_GATE_32.2 OUT.3 Q4_U_NOR_GATE_20.3 Q5_U_NOR_GATE_20.3 R15_U_XOR_GATE_32.1 RO2_U_NOR_GATE_20.1 Y_R2_U_NOR_GATE_20.2 | length 64.4
  Top Layer w0.254: Y_R2_U_NOR_GATE_20.2@89.266,116.19 89.316,116.19 91.17,114.336 Q4_U_NOR_GATE_20.3@91.17,113.538 Q5_U_NOR_GATE_20.3@91.17,109.982 ; RO2_U_NOR_GATE_20.1@90.566,107.33 90.864,107.628 90.864,108.895 91.17,109.201 Q5_U_NOR_GATE_20.3@91.17,109.982 ; v1(93.968,84.074) 96.358,84.074 R15_U_XOR_GATE_32.1@96.612,84.328 96.612,84.378 96.314,84.676 95.814,84.676 95.034,85.456 AIN_R4_U_XOR_GATE_32.2@94.984,85.456 ; v1(95.25,106.426) 95.25,107.234 92.502,109.982 Q5_U_NOR_GATE_20.3@91.17,109.982 ; v1(109.208,101.346) 110.225,101.346 110.479,101.6 OUT.3@111.76,101.6
  Bottom Layer w0.254: v1(93.968,84.074) 93.968,86.614 95.758,88.404 95.758,96.774 94.223,98.309 94.223,103.227 94.234,103.238 94.234,103.886 95.25,104.902 v1(95.25,106.426) 97.79,103.886 107.818,103.886 109.208,102.496 v1(109.208,101.346)